# Altium PCB RockRTK.PcbDoc (part 1 of 8)
Units mm, origin at the board's own origin, x right, y up, seen from the top; angles counter-clockwise.
Board outline 128 x 72 mm, 6 copper layers (Top Layer, MidLayer1GND, MidLayer2SIG, MidLayer3PWR, MidLayer4GND, Bottom Layer), stack 1.538 mm thick; 400 components, 307 nets, 1795 pads, 1243 vias.
Unrouted connection lines stored in the file: 522.
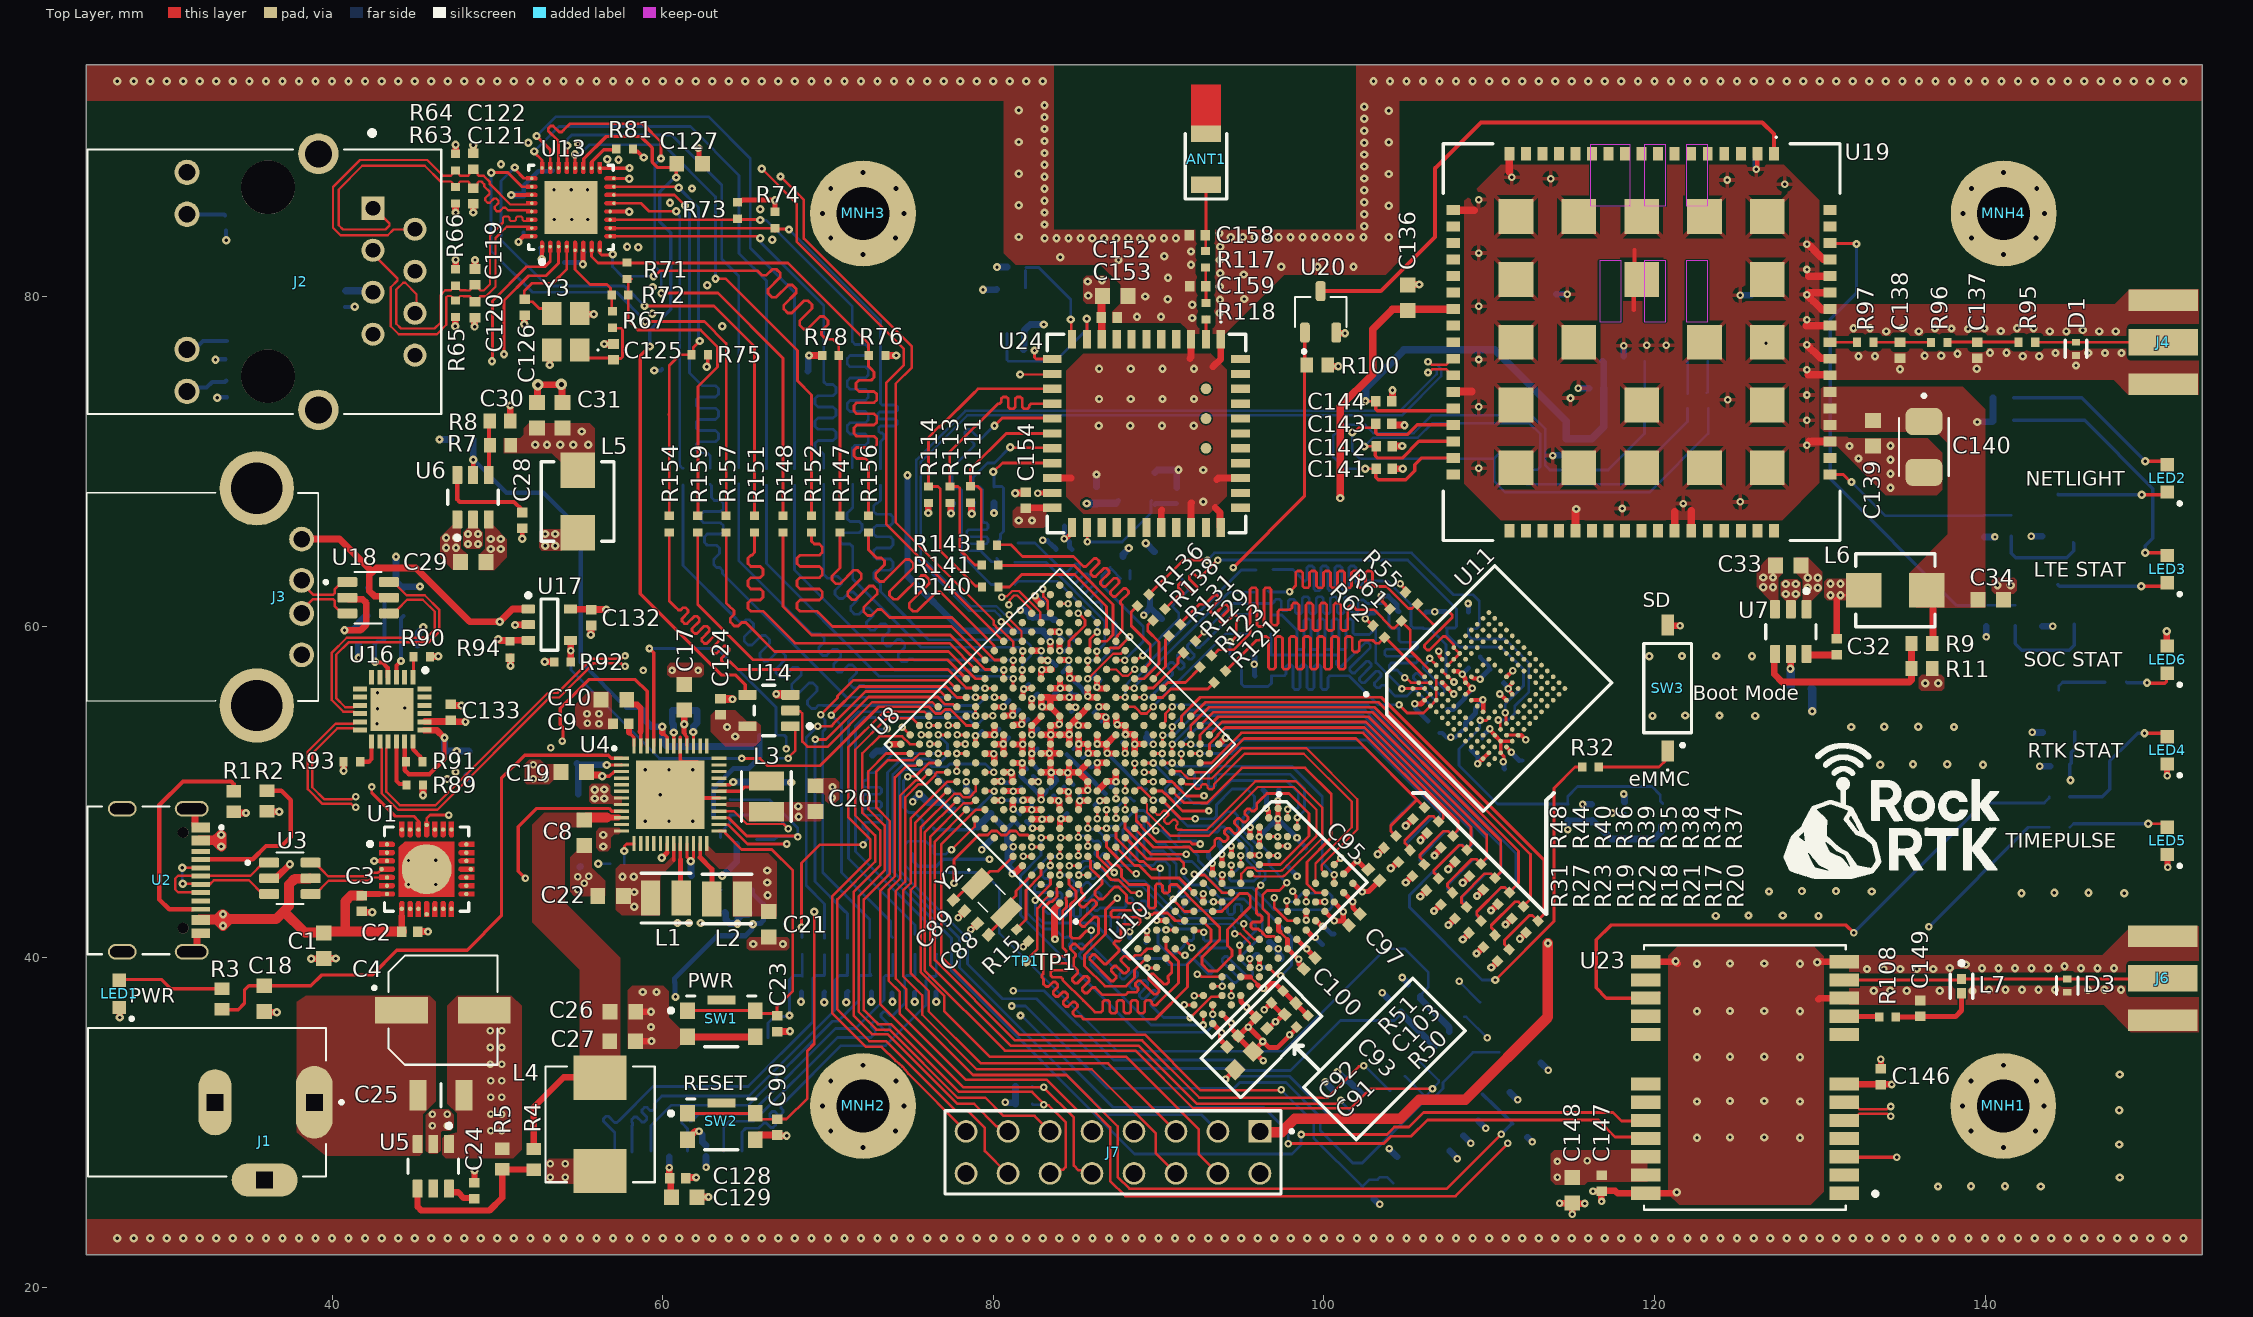
[diagram p0: Top Layer view]
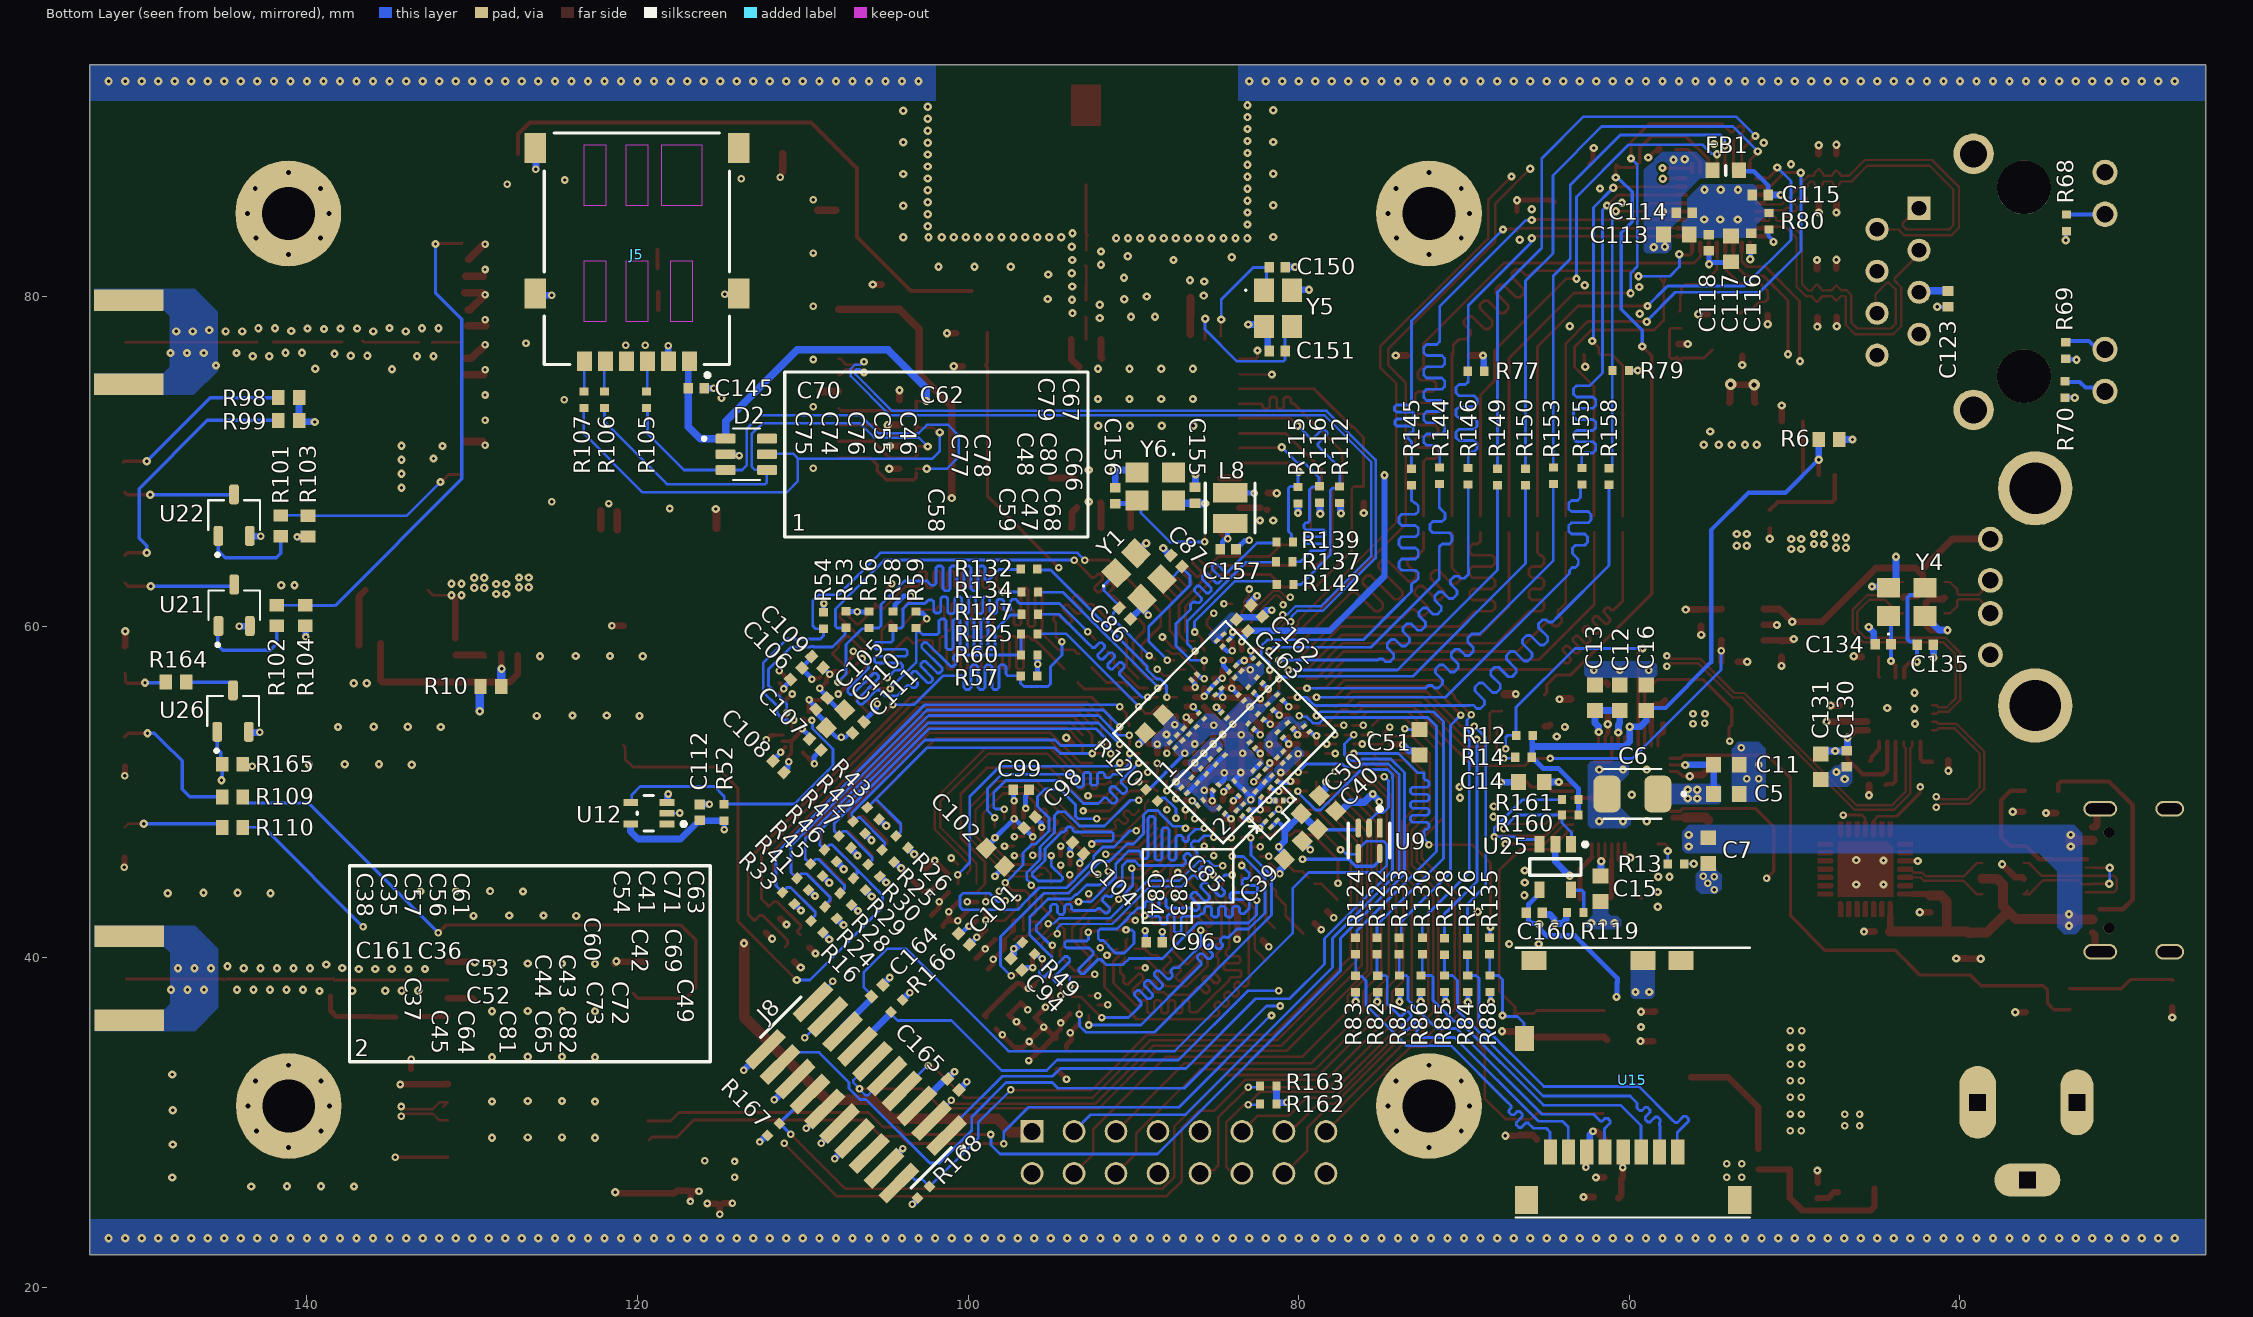
[diagram p1: Bottom Layer view, seen from below]
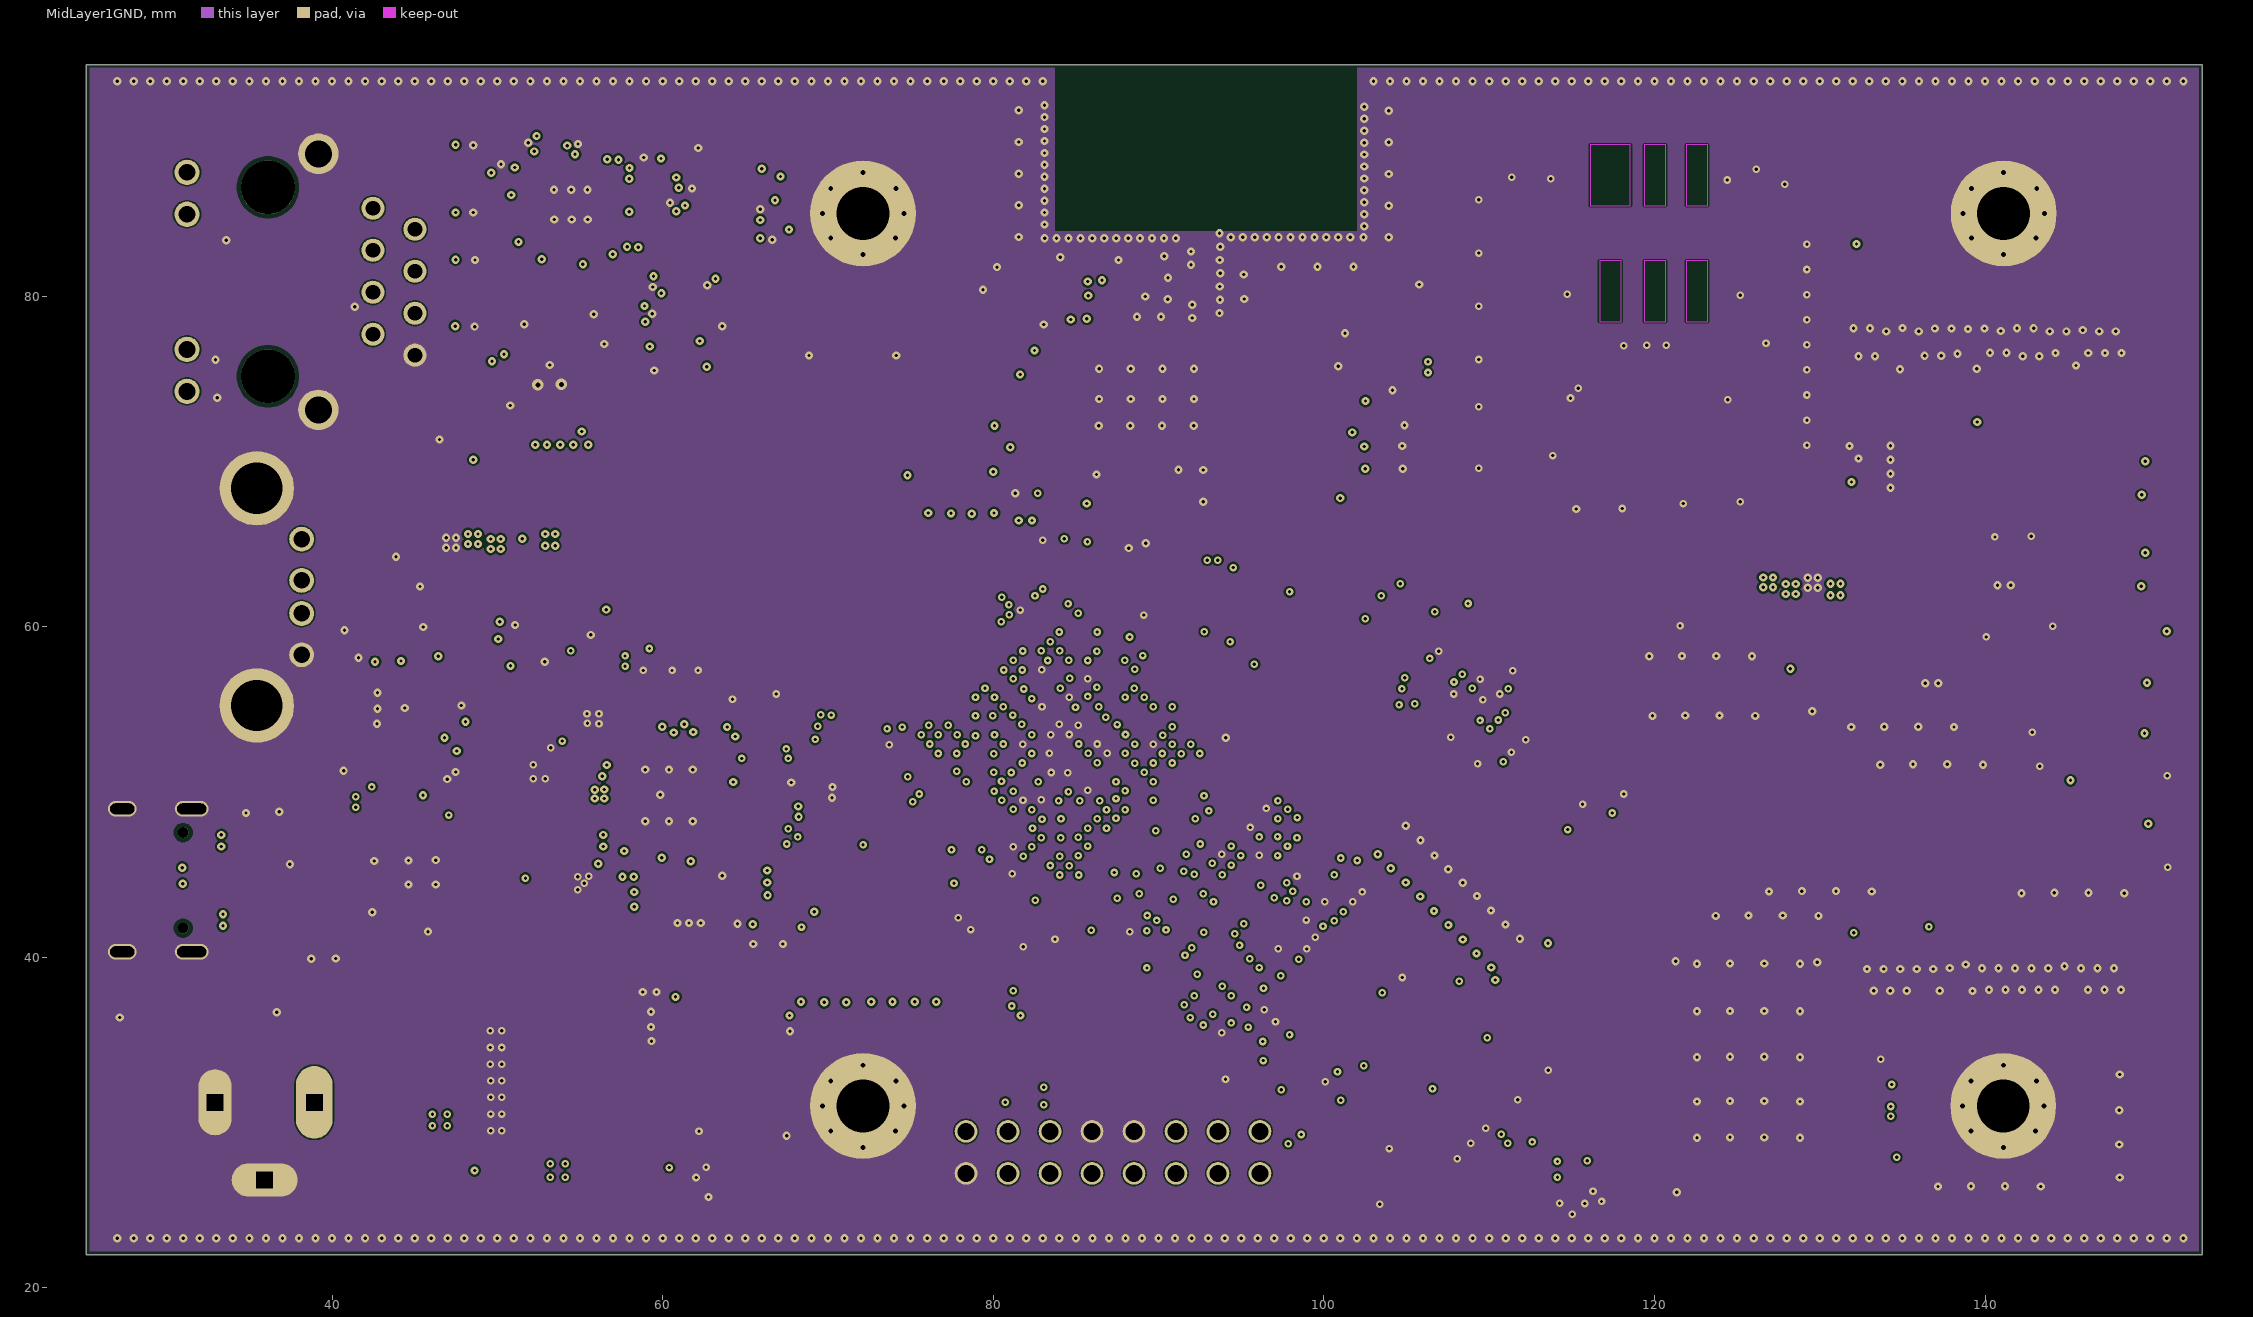
[diagram p2: MidLayer1GND]
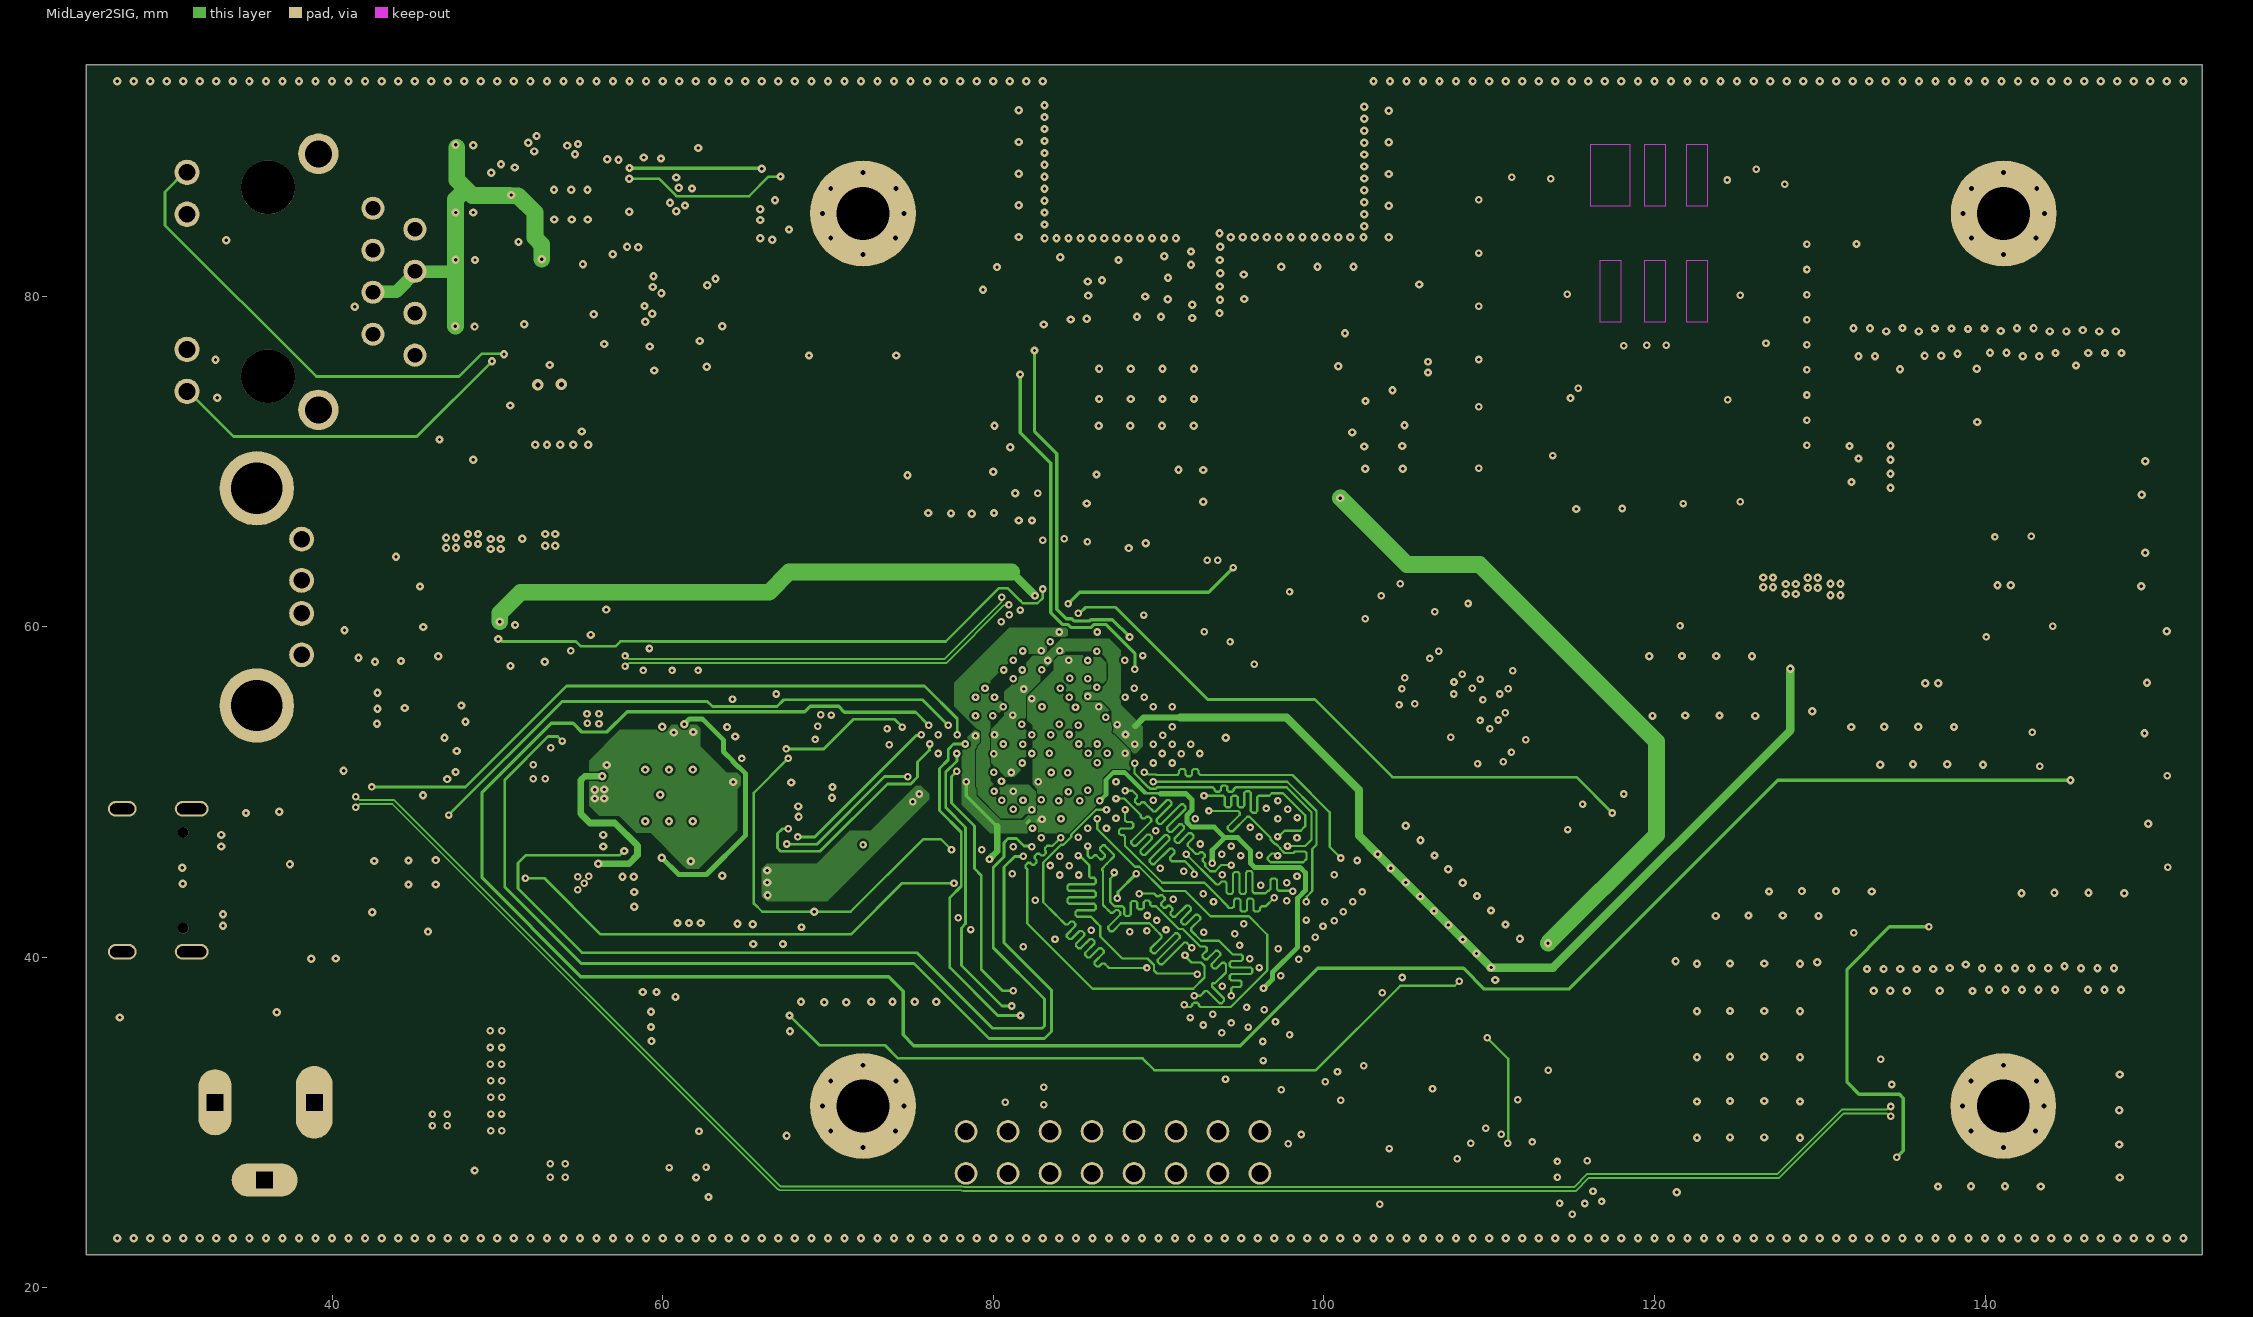
[diagram p3: MidLayer2SIG]
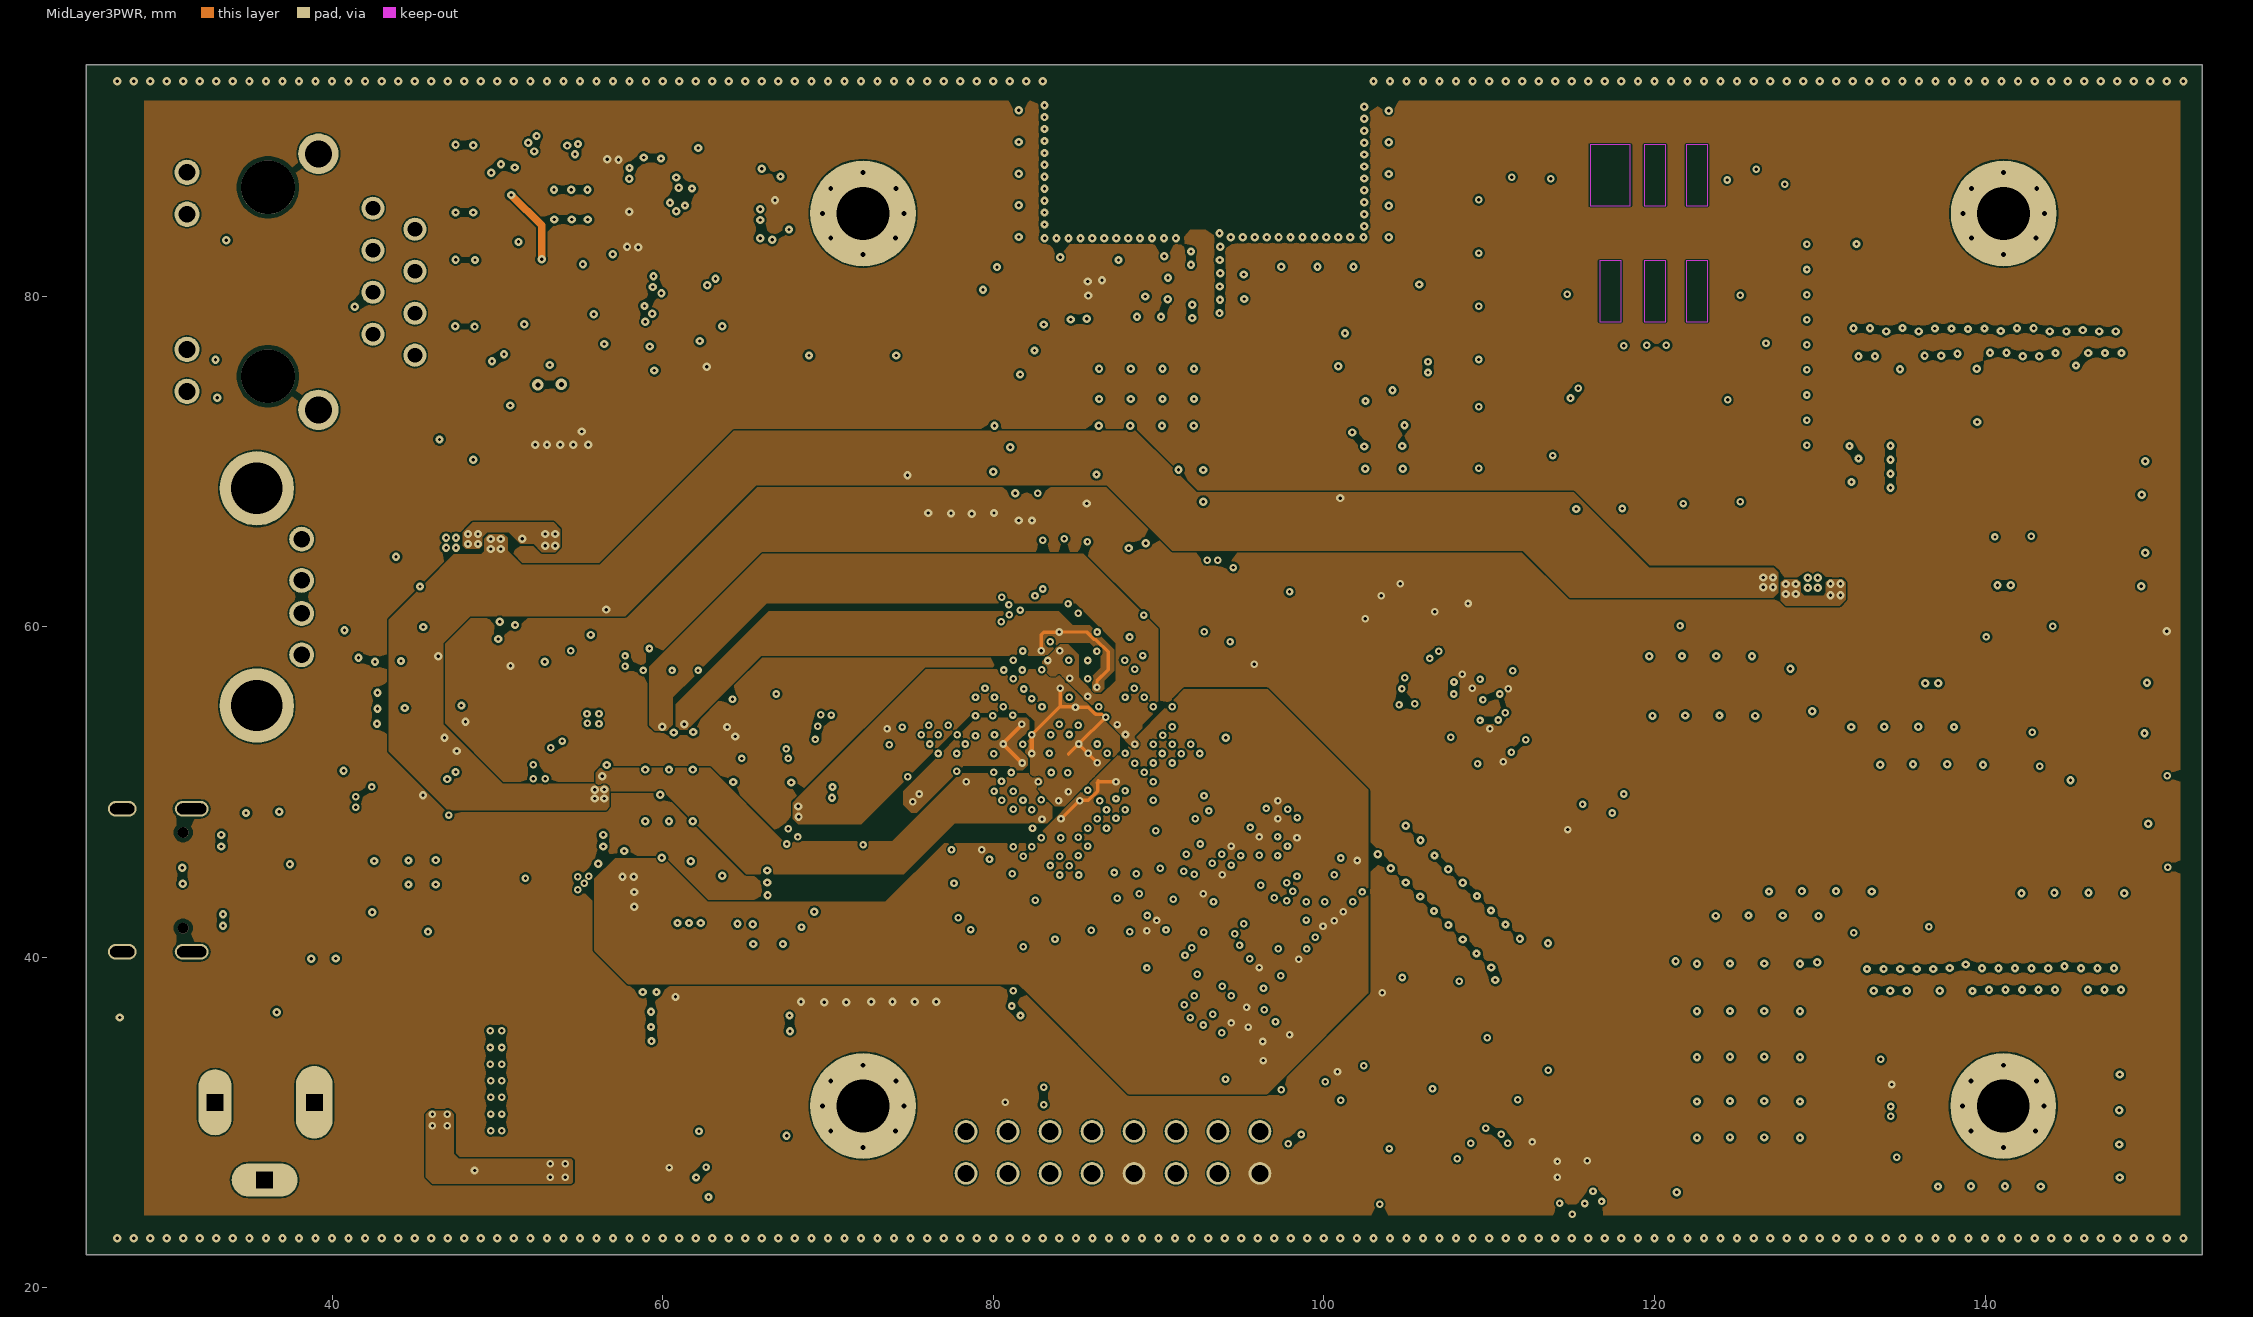
[diagram p4: MidLayer3PWR]
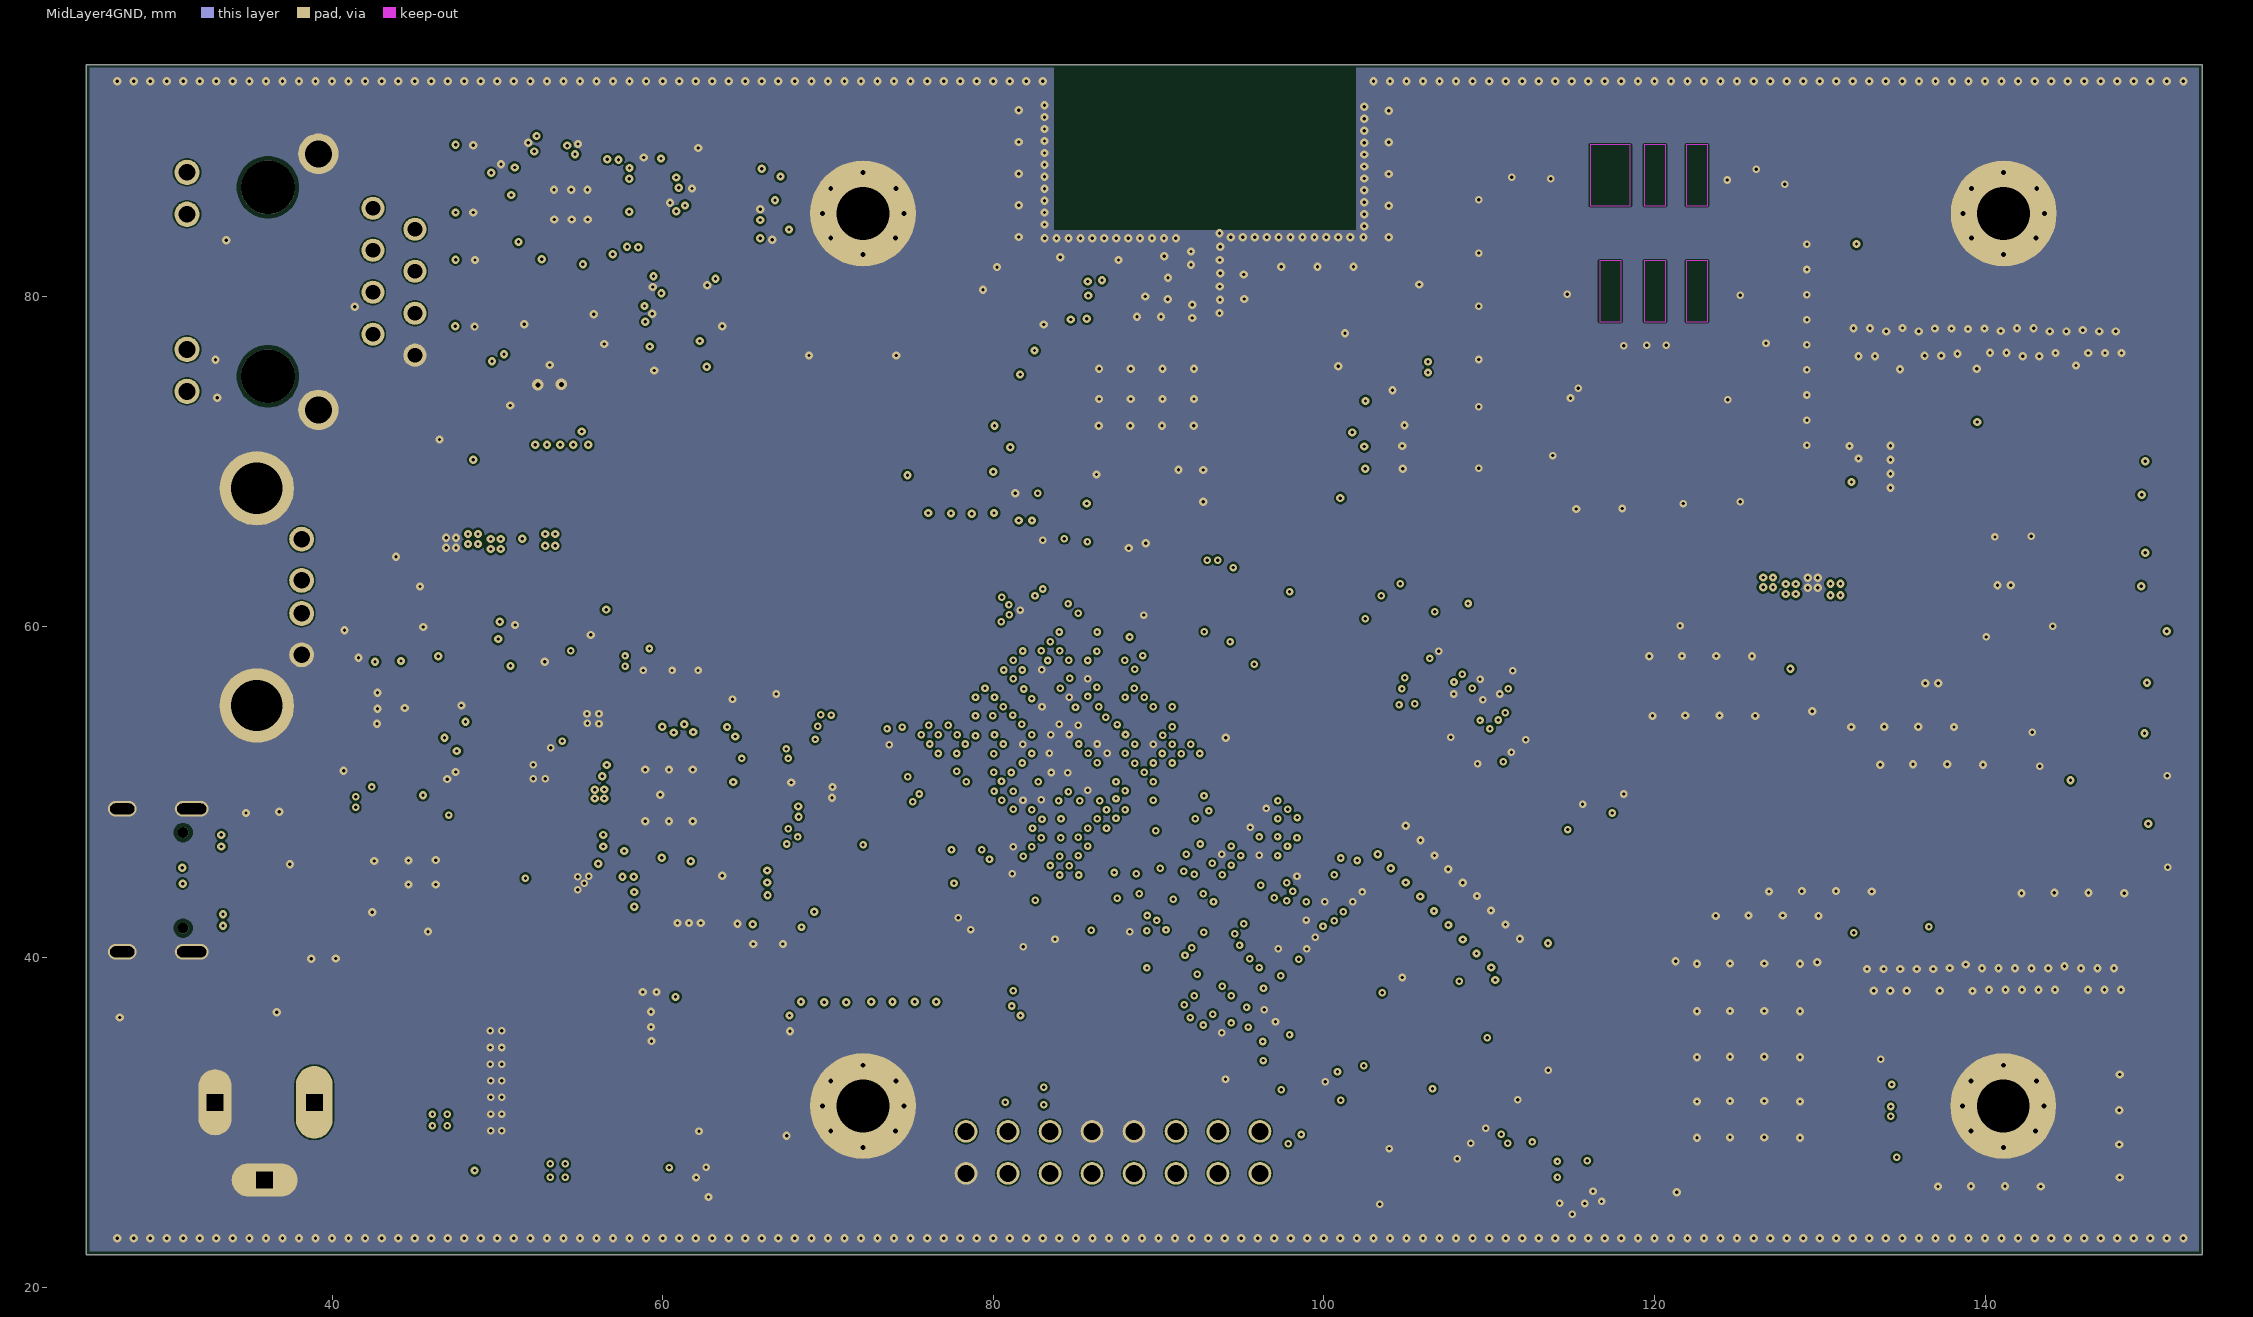
[diagram p5: MidLayer4GND]
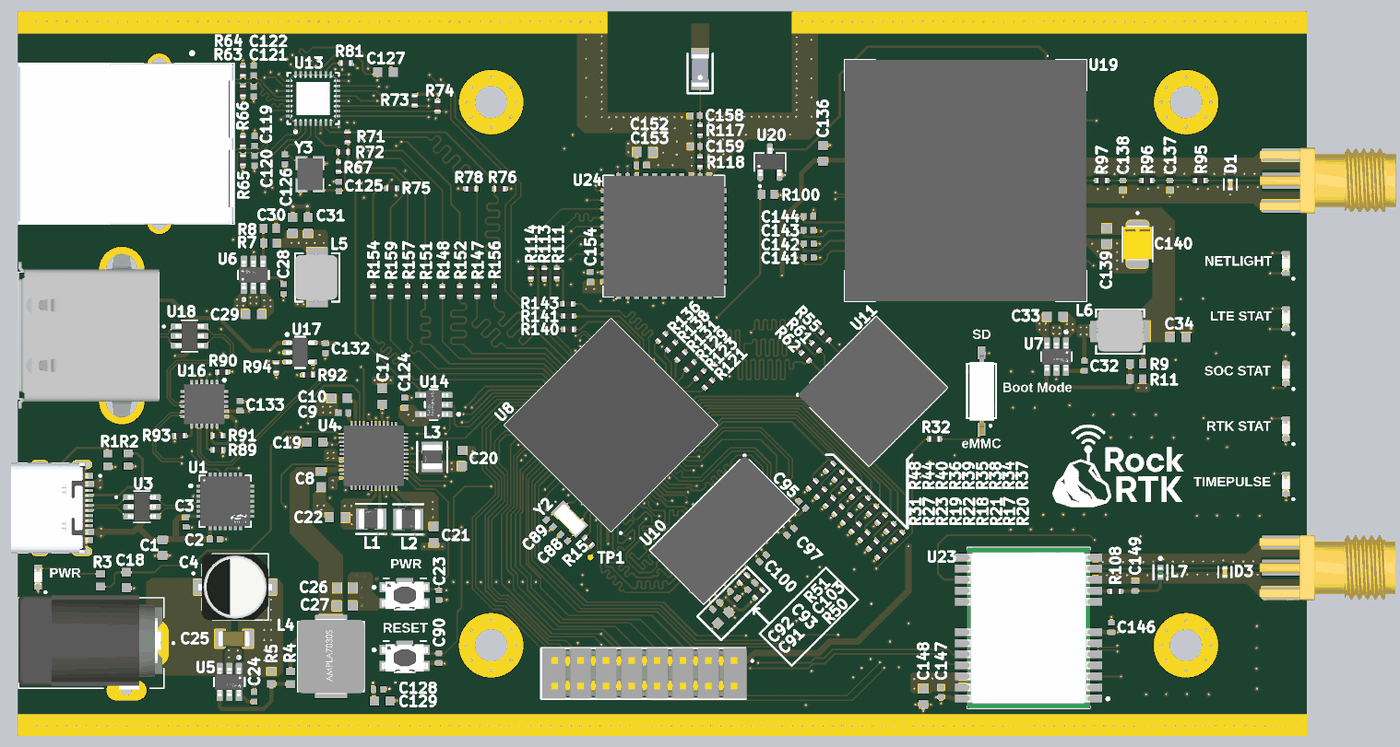
[diagram p12: 3D render of the assembled board from above, using the file's embedded part models]
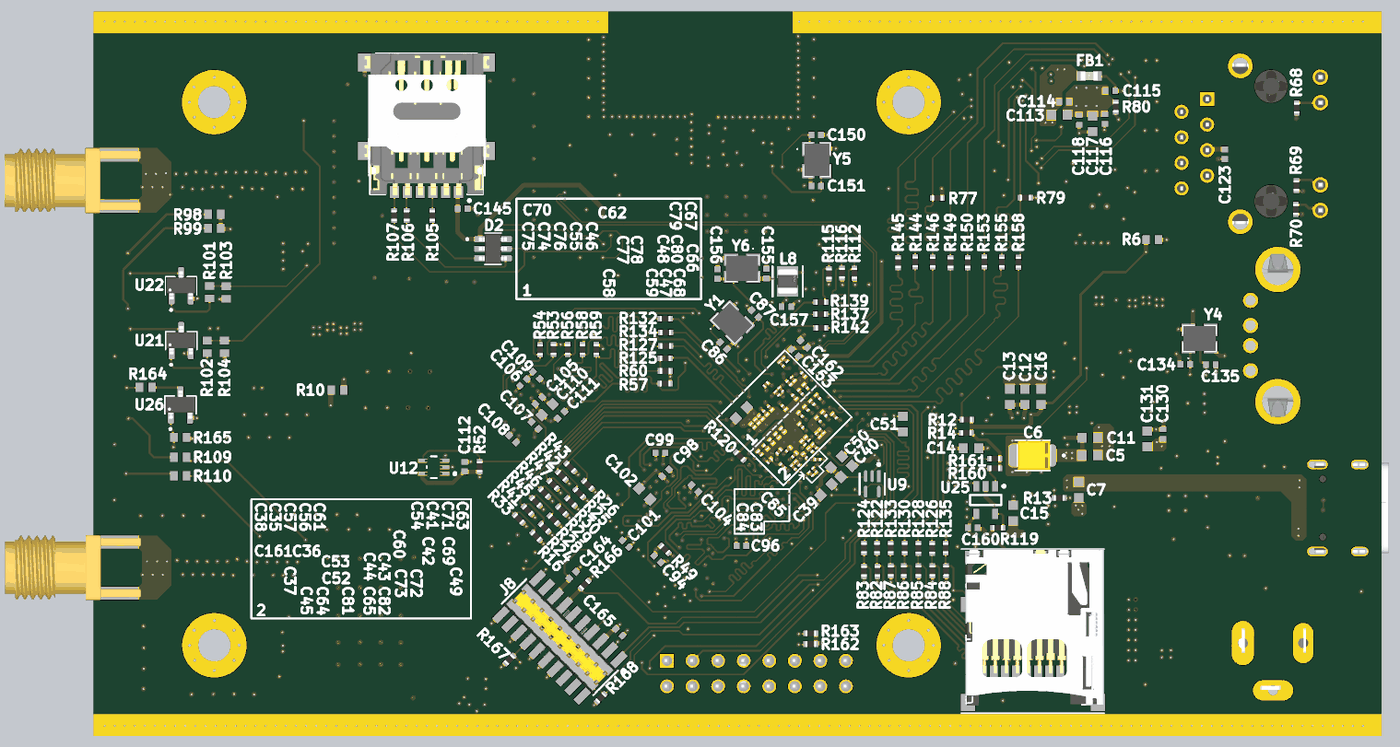
[diagram p13: 3D render of the assembled board from below, using the file's embedded part models]

## Layer stack, top to bottom
Top Solder: solder mask 0.0127, Solder Resist, Dk 3.8
Top Layer: signal copper 0.035
Dielectric 1: prepreg 0.0994, 3313, Dk 4.1
MidLayer1GND: signal copper 0.0152
Core 1: core 0.55, FR-4, Dk 4.6
MidLayer2SIG: signal copper 0.0152
Dielectric 2: prepreg 0.1088, 2116, Dk 4.16
MidLayer3PWR: signal copper 0.0152
Core 2: core 0.55, FR-4, Dk 4.6
MidLayer4GND: signal copper 0.0152
Dielectric 3: prepreg 0.0994, 3313, Dk 4.1
Bottom Layer: signal copper 0.035
Bottom Solder: solder mask 0.0127, Solder Resist, Dk 3.8

## Board outline
25.127,22 25.127,94 153.127,94 153.127,22

## Design rules (kind name [scope] priority, off if disabled: settings)
BoardOutlineClearance BoardOutlinegGuardRingClearance [IsPolygon AND (Name Like 'GUARD_RING_GND_TOP' OR Name Like 'GUARD_RING_MASK_TOP' OR Name Like 'GUARD_RING_GND_BOTTOM' OR Name Like 'GUARD_RING_MASK_BOTTOM')] p1: gap=0.2 ignorepadtopadclearanceinfootprint=FALSE except(0: Poly-OutlineEdge)
BoardOutlineClearance BoardOutlineSilkClearance [OnLayer('Top Overlay')] p2: gap=0.2 ignorepadtopadclearanceinfootprint=FALSE except(0: Track-OutlineEdge)
BoardOutlineClearance [All] p3: gap=0.2 ignorepadtopadclearanceinfootprint=FALSE
Clearance 3V3Layer4 [InNamedPolygon('3V3_4LAYER')] p1: gap=0.254 ignorepadtopadclearanceinfootprint=FALSE
Clearance "Stitching GND" [IsStitchingVia and InNet('GND') vs (IsVia and (Not IsStitchingVia)) Or IsPad] p2: gap=0.5 ignorepadtopadclearanceinfootprint=FALSE
Clearance "Stitching No Net" [IsStitchingVia and InNet('No Net') vs (IsVia and (Not IsStitchingVia)) Or IsPad] p3: gap=0.127 ignorepadtopadclearanceinfootprint=FALSE
Clearance [All] p4: gap=0.089 ignorepadtopadclearanceinfootprint=FALSE except(0.1: SMDPad-Via; 0.127: Arc-Via Track-Via THPad-Via Via-Via Via-Fill Via-Poly Via-Region Via-Text; 0.15: SMDPad-Hole; 0.25: Arc-Hole Track-Hole THPad-Hole Via-Hole Fill-Hole Poly-Hole Region-Hole Text-Hole)
ComponentClearance [All] p1: gap=0.089 collisioncheckmode=3 verticalgap=0.089 showdistances=TRUE
DiffPairsRouting DiffPair [InDifferentialPair ('DDR3L_DQS1')] p1: maxlimit=0.203 minlimit=0.203 mostfreqgap=0.203 toplayer_minwidth=0.138 toplayer_maxwidth=0.138 toplayer_prefwidth=0.138 midlayer2_minwidth=0.108 midlayer2_maxwidth=0.108 midlayer2_prefwidth=0.108 midlayer3_minwidth=0.108 midlayer3_maxwidth=0.108 midlayer3_prefwidth=0.108 bottomlayer_minwidth=0.138 bottomlayer_maxwidth=0.138 bottomlayer_prefwidth=0.138 impedanceprofiledriven=TRUE impedanceprofileid={A6AB74A0-47EF-4ED0-91CB-7269551F2D8C} impedanceprofilevalue=100.000000 maxuncoupledlength=12.7
DiffPairsRouting DIFF100 [InDifferentialPairClass('DIFF100')] p2: maxlimit=0.203 minlimit=0.203 mostfreqgap=0.203 toplayer_minwidth=0.138 toplayer_maxwidth=0.138 toplayer_prefwidth=0.138 midlayer2_minwidth=0.108 midlayer2_maxwidth=0.108 midlayer2_prefwidth=0.108 midlayer3_minwidth=0.108 midlayer3_maxwidth=0.108 midlayer3_prefwidth=0.108 bottomlayer_minwidth=0.138 bottomlayer_maxwidth=0.138 bottomlayer_prefwidth=0.138 impedanceprofiledriven=TRUE impedanceprofileid={A6AB74A0-47EF-4ED0-91CB-7269551F2D8C} impedanceprofilevalue=100.000000 maxuncoupledlength=12.7
DiffPairsRouting DIFF90 [InDifferentialPairClass('DIFF90')] p3: maxlimit=0.127 minlimit=0.127 mostfreqgap=0.127 toplayer_minwidth=0.146 toplayer_maxwidth=0.146 toplayer_prefwidth=0.146 midlayer2_minwidth=0.113 midlayer2_maxwidth=0.113 midlayer2_prefwidth=0.113 midlayer3_minwidth=0.113 midlayer3_maxwidth=0.113 midlayer3_prefwidth=0.113 bottomlayer_minwidth=0.146 bottomlayer_maxwidth=0.146 bottomlayer_prefwidth=0.146 impedanceprofiledriven=TRUE impedanceprofileid={8EBA4F38-930D-482D-A09E-9571FC228CDE} impedanceprofilevalue=90.000000 maxuncoupledlength=12.7
Height [All] p1: minheight=0 maxheight=1816.048 prefheight=12.7
HoleSize [All] p1: absolutevalues=TRUE maxlimit=6.3 minlimit=0.2 maxpercent=80.000 minpercent=20.000
HoleToHoleClearance [All] p1: gap=0.25 allowstackedmicrovias=FALSE
MatchedLengths RJ45LengthMatch [InDifferentialPair('RJ45_RX') OR InDifferentialPair('RJ45_TX')] p1: tolerance=0.025 checknetsindiffpair=TRUE checkdiffpairvsdiffpair=FALSE checkxsignals=FALSE checkothers=FALSE
MatchedLengths EMMCLengthMatch [InxSignalClass('EMMC_GROUP_XSIGNAL')] p2: tolerance=0.254 checknetsindiffpair=FALSE checkdiffpairvsdiffpair=TRUE checkxsignals=TRUE checkothers=TRUE
MatchedLengths SDCARDLengthMatch [InxSignalClass('SDCARD_GROUP_XSIG')] p3: tolerance=0.254 checknetsindiffpair=FALSE checkdiffpairvsdiffpair=TRUE checkxsignals=TRUE checkothers=TRUE
MatchedLengths SDWIFILengthMatch [InxSignalClass('SDWIFI_GROUP_XSIG')] p4: tolerance=0.254 checknetsindiffpair=FALSE checkdiffpairvsdiffpair=TRUE checkxsignals=TRUE checkothers=TRUE
MatchedLengths DIFF100LengthMatch [InDifferentialPairClass('DIFF100')] p5: tolerance=0.025 checknetsindiffpair=TRUE checkdiffpairvsdiffpair=FALSE checkxsignals=FALSE checkothers=FALSE
MatchedLengths DDR3DataByte1Group [InNetClass('DDR3_DATA_BYTE_GROUP_1')] p6: tolerance=0.254 checknetsindiffpair=FALSE checkdiffpairvsdiffpair=TRUE checkxsignals=TRUE checkothers=TRUE
MatchedLengths DDR3DataByte0Group [InNetClass('DDR3_DATA_BYTE_GROUP_0')] p7: tolerance=0.254 checknetsindiffpair=FALSE checkdiffpairvsdiffpair=TRUE checkxsignals=TRUE checkothers=TRUE
MatchedLengths DDR3ClkGroup [InNetClass('DDR3_CLOCK_GROUP')] p8: tolerance=0.254 checknetsindiffpair=FALSE checkdiffpairvsdiffpair=TRUE checkxsignals=TRUE checkothers=TRUE
MatchedLengths DDR3AddrCmdGroup [InNetClass('DDR3_ADDR_CMD_GROUP')] p9: tolerance=0.254 checknetsindiffpair=FALSE checkdiffpairvsdiffpair=TRUE checkxsignals=TRUE checkothers=TRUE
MatchedLengths MIILengthMatch [InxSignalClass('MII_GROUP_XSIG')] p10: tolerance=0.635 checknetsindiffpair=FALSE checkdiffpairvsdiffpair=TRUE checkxsignals=TRUE checkothers=TRUE
MinimumAnnularRing [All] p1: minimumring=0.076
MinimumSolderMaskSliver [All] p1: minsoldermaskwidth=0
PlaneClearance 3V3_PWR_PLANE [InNamedPolygon('3V3_PWR_PLANE')] p1: clearance=0.508
PlaneClearance [All] p2: clearance=0.089
PlaneConnect PlaneConnectPowerPads [InPadClass('PowerPads')] p1: planeconnectstyle=Direct reliefexpansion=0.508 reliefentries=4 reliefconductorwidth=0.254 reliefairgap=0.254
PlaneConnect [All] p2: planeconnectstyle=Direct reliefexpansion=0.3 reliefentries=4 reliefconductorwidth=0.089 reliefairgap=0.089
PolygonConnect PolygonConnectUnderModules [All vs IsNamedPolygon('UNDER_MODULE_LTE')] p1: thpad.connectstyle=Relief thpad.reliefconductorwidth=0.254 thpad.reliefentries=4 thpad.polygonreliefangle="90 Angle" thpad.airgapwidth=0.254 smdpad.connectstyle=Relief smdpad.reliefconductorwidth=0.254 smdpad.reliefentries=4 smdpad.polygonreliefangle="45 Angle" smdpad.airgapwidth=0.254 via.connectstyle=Relief via.reliefconductorwidth=0.254 via.reliefentries=4 via.polygonreliefangle="90 Angle" via.airgapwidth=0.254
PolygonConnect PolygonConnectPowerPads [All vs (InPadClass('PowerPads'))] p2: connectstyle=Direct reliefconductorwidth=0.254 reliefentries=4 polygonreliefangle="90 Angle" airgapwidth=0.254
PolygonConnect [All] p3: connectstyle=Direct reliefconductorwidth=0.089 reliefentries=4 polygonreliefangle="90 Angle" airgapwidth=0.089
RoutingVias [All] p1: holewidth=0.2 width=0.45 viastyle="Through Hole" minholewidth=0.2 minwidth=0.45 maxholewidth=6.3 maxwidth=6.55
SilkToSilkClearance [All] p1: silktosilkclearance=0
SilkToSolderMaskClearance [IsPad] p1: minsilkscreentomaskgap=0.089 clearancetoexposedcopper=TRUE
SolderMaskExpansion [All] p1: expansion=0.075 istentingtop=FALSE
SupplyNets "Schematic Supply Nets_18" [InNet('VBUS_IN')] p1: voltage=0.000
SupplyNets "Schematic Supply Nets_17" [InNet('VBUS_OUT')] p2: voltage=0.000
SupplyNets "Schematic Supply Nets_16" [InNet('GND')] p3: voltage=0.000
SupplyNets "Schematic Supply Nets_15" [InNet('3V3')] p4: voltage=0.000
SupplyNets "Schematic Supply Nets_14" [InNet('3V7')] p5: voltage=0.000
SupplyNets "Schematic Supply Nets_13" [InNet('LDO_3V3')] p6: voltage=0.000
SupplyNets "Schematic Supply Nets_12" [InNet('VDD_1V5_DDR3L')] p7: voltage=0.000
SupplyNets "Schematic Supply Nets_11" [InNet('LDO_1V8')] p8: voltage=0.000
SupplyNets "Schematic Supply Nets_10" [InNet('VDD_1V1_MPU')] p9: voltage=0.000
SupplyNets "Schematic Supply Nets_9" [InNet('VDD_1V1_CORE')] p10: voltage=0.000
SupplyNets "Schematic Supply Nets_8" [InNet('PHY_VDDCR')] p11: voltage=0.000
SupplyNets "Schematic Supply Nets_7" [InNet('PHY_VDDA')] p12: voltage=0.000
SupplyNets "Schematic Supply Nets_6" [InNet('SIM_VDD')] p13: voltage=0.000
SupplyNets "Schematic Supply Nets_5" [InNet('VCCIN')] p14: voltage=0.000
SupplyNets "Schematic Supply Nets_4" [InNet('DDR_VREF')] p15: voltage=0.000
SupplyNets "Schematic Supply Nets_3" [InNet('LDO_1V8_RTC')] p16: voltage=0.000
SupplyNets "Schematic Supply Nets_2" [InNet('5V_SYS')] p17: voltage=0.000
SupplyNets "Schematic Supply Nets_1" [InNet('5VIN')] p18: voltage=0.000
SupplyNets "Schematic Supply Nets" [InNet('LDO_POWER_LED')] p19: voltage=0.000
Width RFTraceImpedance [InNetClass('RF_TRACE')] p1: maxlimit=0.167 minlimit=0.118 preferedwidth=0.147 toplayer_minwidth=0.167 toplayer_prefwidth=0.167 midlayer2_maxwidth=0.118 midlayer2_prefwidth=0.118 midlayer3_maxwidth=0.118 midlayer3_prefwidth=0.118 bottomlayer_minwidth=0.147 bottomlayer_maxwidth=0.147 impedanceprofiledriven=TRUE impedanceprofileid={81F7A5AC-D884-4479-AB0D-ED1311176530} impedanceprofilevalue=50.000000 minimp=50.000000 maximp=50.000000 favimp=50.000000
Width MMCImpedance [InNetClass('EMMC_GROUP') OR InNetClass('SDWIFI_GROUP') OR InNetClass('SDCARD_GROUP')] p2: maxlimit=0.169 minlimit=0.139 preferedwidth=0.169 toplayer_minwidth=0.169 midlayer2_maxwidth=0.139 midlayer2_prefwidth=0.139 midlayer3_maxwidth=0.139 midlayer3_prefwidth=0.139 bottomlayer_minwidth=0.169 impedanceprofiledriven=TRUE impedanceprofileid={5A89C1FB-E82D-4FD1-9412-6AF9453DA043} impedanceprofilevalue=50.000000 minimp=50.000000 maximp=50.000000 favimp=50.000000
Width DDR3SingleImpedance [InNetClass('DDR3_ADDR_CMD_GROUP') OR  InNetClass('DDR3_DATA_GROUP') OR  InNetClass('DDR3_CONTROL_GROUP')] p3: maxlimit=0.169 minlimit=0.139 preferedwidth=0.169 toplayer_minwidth=0.169 midlayer2_maxwidth=0.139 midlayer2_prefwidth=0.139 midlayer3_maxwidth=0.139 midlayer3_prefwidth=0.139 bottomlayer_minwidth=0.169 impedanceprofiledriven=TRUE impedanceprofileid={5A89C1FB-E82D-4FD1-9412-6AF9453DA043} impedanceprofilevalue=50.000000 minimp=50.000000 maximp=50.000000 favimp=50.000000
Width MIIImpedance [InNetClass('MII_GROUP')] p4: maxlimit=0.169 minlimit=0.139 preferedwidth=0.169 toplayer_minwidth=0.169 midlayer2_maxwidth=0.139 midlayer2_prefwidth=0.139 midlayer3_maxwidth=0.139 midlayer3_prefwidth=0.139 bottomlayer_minwidth=0.169 impedanceprofiledriven=TRUE impedanceprofileid={5A89C1FB-E82D-4FD1-9412-6AF9453DA043} impedanceprofilevalue=50.000000 minimp=50.000000 maximp=50.000000 favimp=50.000000
20 further rules are at their usual default settings.

## Classes and differential pairs
net class RF_TRACE: F9P_RF_IN LTE_ANT LTE_ANT_CON LTE_ANT_MATCH LTE_ANT_MATCH_OUT WIFI_ANT WIFI_ANT_MATCH WIFI_ANT_MATCH_OUT
net class SDWIFI_GROUP: MMC2_CLK MMC2_CLK_R MMC2_CMD MMC2_CMD_R MMC2_DAT0 MMC2_DAT0_R MMC2_DAT1 MMC2_DAT1_R MMC2_DAT2 MMC2_DAT2_R MMC2_DAT3 MMC2_DAT3_R
net class SDCARD_GROUP: MMC0_CLK MMC0_CLK_R MMC0_CMD MMC0_CMD_R MMC0_DAT0 MMC0_DAT0_R MMC0_DAT1 MMC0_DAT1_R MMC0_DAT2 MMC0_DAT2_R MMC0_DAT3 MMC0_DAT3_R
net class EMMC_GROUP: MMC1_CLK MMC1_CLK_R MMC1_CMD MMC1_CMD_R MMC1_DAT0 MMC1_DAT0_R MMC1_DAT1 MMC1_DAT1_R MMC1_DAT2 MMC1_DAT2_R MMC1_DAT3 MMC1_DAT3_R MMC1_DAT4 MMC1_DAT4_R MMC1_DAT5 MMC1_DAT5_R MMC1_DAT6 MMC1_DAT6_R MMC1_DAT7 MMC1_DAT7_R
net class MDI_GROUP: RJ45_RX_N RJ45_RX_P RJ45_TX_N RJ45_TX_P
net class MII_GROUP: PHY_COL PHY_CRS PHY_REFCLK PHY_RXCLK PHY_RXD0 PHY_RXD1 PHY_RXD2 PHY_RXD3 PHY_RXDV PHY_RXER PHY_TXCLK PHY_TXD0 PHY_TXD1 PHY_TXD2 PHY_TXD3 PHY_TXEN SOC_MII_COL SOC_MII_CRS SOC_MII_RXCLK SOC_MII_RXD0 SOC_MII_RXD1 SOC_MII_RXD2 SOC_MII_RXD3 SOC_MII_RXDV SOC_MII_RXER SOC_MII_TXCLK SOC_MII_TXD0 SOC_MII_TXD1 SOC_MII_TXD2 SOC_MII_TXD3 SOC_MII_TXEN SOC_RMII_REFCLK
component class Designator: C1 C2 C3 C4 J1 MNH1 MNH2 MNH3 MNH4 R1 R2 U1 U2 U3
net class DDR3_CONTROL_GROUP: DDR3L_CSE DDR3L_CSN DDR3L_ODT
net class DDR3_CLOCK_GROUP: DDR3L_CLK_N DDR3L_CLK_P
net class DDR3_ADDR_CMD_GROUP: DDR3L_A0 DDR3L_A1 DDR3L_A2 DDR3L_A3 DDR3L_A4 DDR3L_A5 DDR3L_A6 DDR3L_A7 DDR3L_A8 DDR3L_A9 DDR3L_A10 DDR3L_A11 DDR3L_A12 DDR3L_A13 DDR3L_A14 DDR3L_B0 DDR3L_B1 DDR3L_B2 DDR3L_CASN DDR3L_RASN DDR3L_WEN NetU8_D3
net class DDR3_DATA_BYTE_GROUP_0: DDR3L_D0 DDR3L_D1 DDR3L_D2 DDR3L_D3 DDR3L_D4 DDR3L_D5 DDR3L_D6 DDR3L_D7 DDR3L_DQM0 DDR3L_DQS0_N DDR3L_DQS0_P
net class DDR3_DATA_GROUP: DDR3L_D0 DDR3L_D1 DDR3L_D2 DDR3L_D3 DDR3L_D4 DDR3L_D5 DDR3L_D6 DDR3L_D7 DDR3L_D8 DDR3L_D9 DDR3L_D10 DDR3L_D11 DDR3L_D12 DDR3L_D13 DDR3L_D14 DDR3L_D15 DDR3L_DQM0 DDR3L_DQM1 DDR3L_DQS0_N DDR3L_DQS0_P DDR3L_DQS1_N DDR3L_DQS1_P
net class DDR3_DATA_BYTE_GROUP_1: DDR3L_D8 DDR3L_D9 DDR3L_D10 DDR3L_D11 DDR3L_D12 DDR3L_D13 DDR3L_D14 DDR3L_D15 DDR3L_DQM1 DDR3L_DQS1_N DDR3L_DQS1_P
differential pair class DIFF100: DDR3L_CLK DDR3L_DQS0 DDR3L_DQS1 RJ45_RX RJ45_TX
differential pair class DIFF90: F9P_USB GP_USB HUB_USB2 TYPEC_USB USB0 USB1 USB_CONVR
net class PHY_TXD[0..3]: PHY_TXD0 PHY_TXD1 PHY_TXD2 PHY_TXD3
net class PHY_RXD[0..3]: PHY_RXD0 PHY_RXD1 PHY_RXD2 PHY_RXD3
net class MMC2_DAT[0..3]: MMC2_DAT0 MMC2_DAT1 MMC2_DAT2 MMC2_DAT3
net class MMC1_DAT[0..7]: MMC1_DAT0 MMC1_DAT1 MMC1_DAT2 MMC1_DAT3 MMC1_DAT4 MMC1_DAT5 MMC1_DAT6 MMC1_DAT7
net class MMC0_DAT[0..3]: MMC0_DAT0 MMC0_DAT1 MMC0_DAT2 MMC0_DAT3
net class DDR3L_D[0..15]: DDR3L_D0 DDR3L_D1 DDR3L_D2 DDR3L_D3 DDR3L_D4 DDR3L_D5 DDR3L_D6 DDR3L_D7 DDR3L_D8 DDR3L_D9 DDR3L_D10 DDR3L_D11 DDR3L_D12 DDR3L_D13 DDR3L_D14 DDR3L_D15
net class DDR3L_B[0..2]: DDR3L_B0 DDR3L_B1 DDR3L_B2
net class DDR3L_A[0..14]: DDR3L_A0 DDR3L_A1 DDR3L_A2 DDR3L_A3 DDR3L_A4 DDR3L_A5 DDR3L_A6 DDR3L_A7 DDR3L_A8 DDR3L_A9 DDR3L_A10 DDR3L_A11 DDR3L_A12 DDR3L_A13 DDR3L_A14
component class "SoC MMC": R121 R122 R123 R124 R125 R126 R127 R128 R129 R130 R131 R132 R133 R134 R135 R136 R137 R138 R139 R140 R141 R142 R143
component class "Micro SD Card": C128 C129 R82 R83 R84 R85 R86 R87 R88 U15
component class Designator: C113 C114 C115 C116 C117 C118 C119 C120 C121 C122 C123 C124 C125 C126 C127 FB1 J2 R63 R64 R65 R66 R67 R68 R69 R70 R71 R72 R73 R74 R75 R76 R77 R78 R79 R80 R81 U13 U14 Y3
component class "DDR3L Chip": C91 C92 C93 C94 C95 C96 C97 C98 C99 C100 C101 C102 C103 C104 R49 R50 R51 U10
component class "AM3358 DDR Controller": C161 R120
differential pair USB_CONVR: +USB_CONVR_P -USB_CONVR_N
differential pair USB1: +USB1_P -USB1_N
differential pair USB0: +USB0_P -USB0_N
differential pair TYPEC_USB: +TYPEC_USB_P -TYPEC_USB_N
differential pair RJ45_TX: +RJ45_TX_P -RJ45_TX_N
differential pair RJ45_RX: +RJ45_RX_P -RJ45_RX_N
differential pair HUB_USB2: +HUB_USB2_P -HUB_USB2_N
differential pair GP_USB: +GP_USB_P -GP_USB_N
differential pair F9P_USB: +F9P_USB_P -F9P_USB_N
differential pair DDR3L_DQS1: +DDR3L_DQS1_P -DDR3L_DQS1_N
differential pair DDR3L_DQS0: +DDR3L_DQS0_P -DDR3L_DQS0_N
differential pair DDR3L_CLK: +DDR3L_CLK_P -DDR3L_CLK_N

## Components (designator, comment, footprint, x,y, rotation, side; value= is the part's Value field where it differs from the comment)
ANT1 "ANT3216LL00R2400A" ANT_1206 92.925,88.275 r90 top
C1 "10uF 16V" C_0603 39.5,40.7 r270 top
C2 "100nF 16V" C_0402 44.7,41.55 r0 top
C3 "100nF 16V" C_0402 41.8,43.25 r270 top
C4 "50V 100uF" CAP_D6.3xL7.7mm 46.875,36.8 r0 top
C5 "10uF 16V" C_0603 54.125,49.875 r180 bottom
C6 "100uF 10V" C_CASE-B 59.684,49.806 r270 bottom
C7 "10uF 16V" C_0603 55.225,46.45 r270 bottom
C8 "10uF 16V" C_0603 55.25,47.525 r270 top
C9 "100nF 16V" C_0402 57.475,54.125 r180 top
C10 "10uF 16V" C_0603 57.05,55.575 r180 top
C11 "10uF 16V" C_0603 54.125,51.65 r180 bottom
C12 "10uF 16V" C_0603 60.575,55.7 r90 bottom
C13 "10uF 16V" C_0603 62.075,55.7 r90 bottom
C14 "10uF 16V" C_0603 65.925,50.6 r0 bottom
C15 "10uF 16V" C_0603 61.75,44.15 r270 bottom
C16 "10uF 16V" C_0603 58.975,55.7 r90 bottom
C17 "10uF 16V" C_0603 61.3,55.725 r90 top
C18 "10uF 16V" C_0603 35.9,37.5 r270 top
C19 "10uF 16V" C_0603 54.625,51.2 r180 top
C20 "10uF 16V" C_0603 69.25,49.6 r90 top
C21 "10uF 16V" C_0603 66.425,42 r270 top
C22 "10uF 16V" C_0603 56.85,43.7 r180 top
C23 "100nF 16V" C_0402 66.925,35.975 r270 top
C24 "100nF 16V" C_0402 48.6,25.88 r90 top
C25 "10uF 50V" C_1206 46.575,31.6 r0 top
C26 "22uF 16V" C_0603 57.6,36.7 r0 top
C27 "22uF 16V" C_0603 57.575,34.925 r0 top
C28 "100nF 16V" C_0402 51.501,66.422 r270 top
C29 "10uF 16V" C_0603 48.541,63.908 r180 top
C30 "22uF 16V" C_0603 52.397,72.782 r90 top
C31 "22uF 16V" C_0603 53.946,72.782 r90 top
C32 "100nF 16V" C_0402 131.025,58.775 r90 top
C33 "10uF 16V" C_0603 128.1,63.7 r0 top
C34 "22uF 16V" C_0603 140.35,61.625 r0 top
C35 "100nF 10V" C_0201#1 86.329,50.69 r225 bottom
C36 "100nF 10V" C_0201#1 85,50.25 r135 bottom
C37 "100nF 10V" C_0201#1 84.625,48.875 r45 bottom
C38 "100nF 10V" C_0201#1 86.941,50.077 r225 bottom
C39 "10uF 16V" C_0603 80.325,46.475 r315 bottom
C40 "10uF 16V" C_0603 78.3,48.3 r315 bottom
C41 "100nF 10V" C_0201#1 82.291,54.566 r45 bottom
C42 "100nF 10V" C_0201#1 81.1,53.475 r45 bottom
C43 "100nF 10V" C_0201#1 82.175,51.55 r45 bottom
C44 "100nF 10V" C_0201#1 82.575,51.15 r45 bottom
C45 "100nF 10V" C_0201#1 83.575,48.725 r45 bottom
C46 "100nF 10V" C_0201#1 85.9,54.575 r225 bottom
C47 "100nF 10V" C_0201#1 82.875,56.2 r45 bottom
C48 "100nF 10V" C_0201#1 84.054,57.065 r225 bottom
C49 "100nF 10V" C_0201#1 79.5,53.825 r45 bottom
C50 "10uF 16V" C_0603 79.3,49.225 r315 bottom
C51 "10uF 16V" C_0603 72.7,53 r270 bottom
C52 "100nF 10V" C_0201#1 83.45,49.925 r135 bottom
C53 "100nF 10V" C_0201#1 84.05,50.475 r135 bottom
C54 "100nF 10V" C_0201#1 82.873,53.984 r45 bottom
C55 "100nF 10V" C_0201#1 86.379,54.095 r225 bottom
C56 "100nF 10V" C_0201#1 85.204,51.815 r225 bottom
C57 "100nF 10V" C_0201#1 85.779,51.24 r225 bottom
C58 "100nF 10V" C_0201#1 84.525,54.625 r225 bottom
C59 "100nF 10V" C_0201#1 83.5,55.675 r225 bottom
C60 "100nF 10V" C_0201#1 82.8,52.85 r45 bottom
C61 "100nF 10V" C_0201#1 84.654,52.365 r225 bottom
C62 "100nF 10V" C_0201#1 86.3,56.925 r135 bottom
C63 "100nF 10V" C_0201#1 81.126,55.731 r45 bottom
C64 "100nF 10V" C_0201#1 83.175,49.1 r45 bottom
C65 "100nF 10V" C_0201#1 81.875,50.45 r45 bottom
C66 "100nF 10V" C_0201#1 82.6,57.9 r225 bottom
C67 "100nF 10V" C_0201#1 84.371,59.39 r45 bottom
C68 "100nF 10V" C_0201#1 82.35,56.775 r45 bottom
C69 "100nF 10V" C_0201#1 80.5,54.025 r45 bottom
C70 "10uF 16V" C_0603 88.75,54.125 r315 bottom
C71 "100nF 10V" C_0201#1 81.708,55.148 r45 bottom
C72 "100nF 10V" C_0201#1 80.75,52.3 r45 bottom
C73 "100nF 10V" C_0201#1 81.125,51.925 r45 bottom
C74 "100nF 10V" C_0201#1 87.216,53.257 r225 bottom
C75 "100nF 10V" C_0201#1 87.654,52.82 r225 bottom
C76 "100nF 10V" C_0201#1 86.816,53.657 r225 bottom
C77 "100nF 10V" C_0201#1 85.225,56.025 r225 bottom
C78 "100nF 10V" C_0201#1 84.85,56.425 r225 bottom
C79 "100nF 10V" C_0201#1 84.771,58.99 r45 bottom
C80 "100nF 10V" C_0201#1 83.654,57.465 r225 bottom
C81 "100nF 10V" C_0201#1 82.425,49.875 r45 bottom
C82 "100nF 10V" C_0201#1 81.45,50.825 r45 bottom
C83 "100nF 10V" C_0201#1 81.5,48.425 r225 bottom
C84 "100nF 10V" C_0201#1 81.859,48.026 r225 bottom
C85 "100nF 10V" C_0201#1 81.175,49.5 r0 bottom
C86 "18pF 16V" C_0402 90.525,60.8 r45 bottom
C87 "18pF 16V" C_0402 87.4,63.975 r225 bottom
C88 "18pF 16V" C_0402 79.375,41.7 r315 top
C89 "18pF 16V" C_0402 77.925,43.125 r135 top
C90 "100nF 16V" C_0402 66.925,29.725 r270 top
C91 "10uF 16V" C_0603 95.175,33.75 r225 top
C92 "100nF 16V" C_0402 94.475,34.9 r225 top
C93 "100nF 16V" C_0402 96.225,36.025 r315 top
C94 "100nF 16V" C_0402 97.075,39.575 r45 bottom
C95 "100nF 16V" C_0402 103.025,44.975 r315 top
C96 "100nF 16V" C_0402 88.75,40.9 r180 bottom
C97 "100nF 16V" C_0402 101.85,42.275 r45 top
C98 "100nF 16V" C_0402 96.275,48.15 r135 bottom
C99 "100nF 16V" C_0402 96.8,50.125 r180 bottom
C100 "100nF 16V" C_0402 99.125,39.625 r45 top
C101 "100nF 16V" C_0402 100.25,41.1 r225 bottom
C102 "10uF 16V" C_0603 98.35,46.05 r225 bottom
C103 "1nF 16V" C_0402 97.975,36.875 r225 top
C104 "100nF 16V" C_0402 93.35,46.6 r45 bottom
C105 "100nF 16V" C_0402 108.864,55.336 r315 bottom
C106 "100nF 16V" C_0402 110.4,57.15 r135 bottom
C107 "100nF 16V" C_0402 109.25,52.875 r225 bottom
C108 "100nF 16V" C_0402 111.475,51.525 r45 bottom
C109 "100nF 16V" C_0402 109.125,57.85 r45 bottom
C110 "10uF 16V" C_0603 108.025,54.425 r315 bottom
C111 "2u2 16V" C_0402 106.65,53.9 r315 bottom
C112 "100nF 16V" C_0402 116.236,48.76 r90 bottom
C113 "10uF 16V" C_0603 57.15,83.725 r180 bottom
C114 "100nF 16V" C_0402 56.682,85.045 r180 bottom
C115 "100nF 16V" C_0402 52.084,86.113 r0 bottom
C116 "100nF 16V" C_0402 52.625,83.325 r90 bottom
C117 "1uF 16V" C_0603 53.85,82.85 r90 bottom
C118 "470pF 16V" C_0402 55.2,83.225 r90 bottom
C119 "10pF" C_0402 48.65,81.155 r90 top
C120 "10pF" C_0402 48.65,79.175 r270 top
C121 "10pF" C_0402 48.55,88.145 r90 top
C122 "10pF" C_0402 48.55,86.05 r270 top
C123 "100nF 16V" C_0402 40.725,79.825 r270 bottom
C124 "100nF 16V" C_0402 63.5,55.15 r90 top
C125 "18pF 16V" C_0402 57.025,76.62 r270 top
C126 "18pF 16V" C_0402 51.65,79.325 r90 top
C127 "1uF 16V" C_0603 61.625,88 r0 top
C128 "100nF 16V" C_0402 60.92,26.625 r0 top
C129 "10uF 16V" C_0603 61.3,25.475 r0 top
C130 "100nF 16V" C_0402 46.85,52 r270 bottom
C131 "10uF 16V" C_0603 48.425,51.525 r270 bottom
C132 "100nF 16V" C_0402 55.672,60.55 r270 top
C133 "100nF 16V" C_0402 47.175,54.825 r90 top
C134 "18pF 16V" C_0402 44.65,58.925 r180 bottom
C135 "18pF 16V" C_0402 42.1,58.9 r0 bottom
C136 "10uF 16V" C_0603 105.075,79.9 r90 top
C137 "NC" C_0402 139.525,76.725 r270 top
C138 "NC" C_0402 134.856,76.725 r270 top
C139 "10uF 16V" C_0603 133.225,71.7 r270 top
C140 "100uF 10V" C_CASE-B 136.375,71 r0 top
C141 "22pF 16V" C_0402 103.65,69.55 r0 top
C142 "22pF 16V" C_0402 103.65,70.913 r0 top
C143 "22pF 16V" C_0402 103.625,72.275 r0 top
C144 "100nF 16V" C_0402 103.625,73.638 r0 top
C145 "100nF 16V" C_0402 116.45,74.425 r180 bottom
C146 "100nF 16V" C_0402 133.7,32.775 r90 top
C147 "100nF 16V" C_0402 116.8,26.325 r270 top
C148 "10uF 16V" C_0603 115.025,25.9 r270 top
C149 "100nF 16V" C_0402 136.075,36.9 r90 top
C150 "18pF 16V" C_0402 81.305,81.75 r0 bottom
C151 "18pF 16V" C_0402 81.305,76.675 r180 bottom
C152 "10uF 16V" C_0603 87.375,80 r0 top
C153 "100nF 16V" C_0402 87.025,78.7 r0 top
C154 "100nF 16V" C_0402 81.975,67.65 r90 top
C155 "100nF 16V" C_0402 86.275,67.95 r90 bottom
C156 "18pF 16V" C_0402 91.1,67.925 r270 bottom
C157 "100nF 16V" C_0402 84.275,64.675 r180 bottom
C158 "NC" C_0402 92.35,83.675 r180 top
C159 "NC" C_0402 92.375,80.6 r180 top
C160 "100nF 16V" C_0402 65.75,42.7 r180 bottom
C161 "100nF 10V" C_0201#2 85.925,49.325 r135 bottom
C162 "100nF 16V" C_0402 82.544,60.954 r225 bottom
C163 "100nF 16V" C_0402 83.419,60.079 r45 bottom
C164 "100nF 16V" C_0402 105.5,37.975 r135 bottom
C165 "100nF 16V" C_0402 100.9,32.3 r225 bottom
D1 "LXES15AAA1-153" FP-LXES15-MFG 145.506,76.805 r270 top
D2 "ESDA6V1-5SC6" SOT-23-6 113.425,70.45 r180 bottom
D3 "LXES15AAA1-153" FP-LXES15-MFG 144.975,38.282 r270 top
FB1 "150R" FB_0603 54.175,87.65 r180 bottom
J1 "DC005" DC005 33.072,31.215 r0 top
J2 "HR911105A" HR911105A 35.296,81.107 r90 top
J3 "USB-231-ARY" TYPE-A_W14xD14.45xH7 38.129,65.307 r270 top
J4 "BWSMA-KE-P001" BATWIRELESS_BWSMA-KE-P001 150.775,77.2 r90 top
J5 "SIM8060-6-1-14-00-A" SIM8060-6-1-14-00-A 119.95,82.8 r0 bottom
J6 "BWSMA-KE-P001" BATWIRELESS_BWSMA-KE-P001 150.75,38.725 r90 top
J7 "header_2.54_16pin_2row" header_2.54_16pin_2row 87.095,28.215 r180 top
J8 "FTSH-110-01-L-DV-K-A" FTSH-110-01-L-DV-K-A 106.863,31.697 r45 bottom
L1 "LQM2HPN2R2MG0L" FP-LQM2HPN_G0-IPC_C 60.199,43.575 r180 top
L2 "LQM2HPN2R2MG0L" FP-LQM2HPN_G0-IPC_C 63.899,43.525 r0 top
L3 "LQM2HPN2R2MG0L" FP-LQM2HPN_G0-IPC_C 66.275,49.726 r270 top
L4 "FXL0630-100-M" FXL0630 56.425,29.875 r90 top
L5 "FXL0420-4R7-M" FXL0420 54.862,67.571 r90 top
L6 "FXL0420-4R7-M" FXL0420 134.575,62.2 r0 top
L7 "LQG15HS47NJ02D" FP-LQG15HH_02-IPC_B 138.575,38.254 r270 top
L8 "LQM2HPN2R2MG0L" FP-LQM2HPN_G0-IPC_C 84.15,67.175 r90 bottom
LED1 "LED_0603_RED" LED_0603 27.125,37.775 r90 top
LED2 "LED_0603_YELLOW" LED_0603 151.025,68.95 r90 top
LED3 "LED_0603_YELLOW" LED_0603 151.025,63.469 r90 top
LED4 "LED_0603_BLUE" LED_0603 151.025,52.506 r90 top
LED5 "LED_0603_BLUE" LED_0603 151.025,47.025 r90 top
LED6 "LED_0603_GREEN" LED_0603 151.025,57.988 r90 top
MNH1 "PMNH_3.2MM" PMNH_3.2MM 141.104,31 r0 top
MNH2 "PMNH_3.2MM" PMNH_3.2MM 72.127,31 r0 top
MNH3 "PMNH_3.2MM" PMNH_3.2MM 72.127,85 r0 top
MNH4 "PMNH_3.2MM" PMNH_3.2MM 141.127,85 r0 top
R1 "5K1" R_0603 34.05,49.425 r90 top
R2 "5K1" R_0603 36.075,49.45 r90 top
R3 "5K1" R_0603 33.35,37.475 r270 top
R4 "75K" R_0603 52.2,27.775 r90 top
R5 "10K" R_0603 50.3,27.8 r270 top
R6 "100K" R_0603 47.925,71.325 r0 bottom
R7 "56K" R_0603 50.18,70.969 r0 top
R8 "12K" R_0603 50.154,72.442 r180 top
R9 "62K" R_0603 136.175,58.975 r0 top
R10 "100K" R_0603 128.875,56.375 r180 bottom
R11 "12K" R_0603 136.175,57.475 r180 top
R12 "10K" R_0402 66.35,53.425 r180 bottom
R13 "10K" R_0402 57.175,45.65 r180 bottom
R14 "10K" R_0402 66.4,52.1 r180 bottom
R15 "10K" R_0402 81.775,41.325 r135 top
R16 "NC" R_0402 109.147,41.846 r225 bottom
R17 "100K" R_0402 110.004,40.978 r225 top
R18 "NC" R_0402 108.29,42.692 r225 top
R19 "NC" R_0402 106.576,44.406 r225 top
R20 "NC" R_0402 110.861,40.121 r225 top
R21 "NC" R_0402 109.147,41.835 r225 top
R22 "NC" R_0402 107.433,43.549 r225 top
R23 "NC" R_0402 105.719,45.263 r225 top
R24 "NC" R_0402 108.303,42.7 r225 bottom
R25 "NC" R_0402 104.85,46.125 r225 bottom
R26 "100K" R_0402 104,46.975 r225 bottom
R27 "100K" R_0402 104.862,46.12 r225 top
R28 "100K" R_0402 107.41,43.518 r225 bottom
R29 "100K" R_0402 106.575,44.425 r225 bottom
R30 "NC" R_0402 105.7,45.25 r225 bottom
R31 "NC" R_0402 104.005,46.977 r225 top
R32 "100R" R_0402 116.125,51.5 r0 top
R33 "100K" R_0402 110.875,43.575 r45 bottom
R34 "NC" R_0402 111.734,42.708 r45 top
R35 "100K" R_0402 109.997,44.444 r45 top
R36 "100K" R_0402 108.3,46.141 r45 top
R37 "100K" R_0402 112.591,41.851 r45 top
R38 "100K" R_0402 110.877,43.565 r45 top
R39 "100K" R_0402 109.166,45.275 r45 top
R40 "100K" R_0402 107.452,46.99 r45 top
R41 "100K" R_0402 110,44.425 r45 bottom
R42 "100K" R_0402 106.6,47.85 r45 bottom
R43 "NC" R_0402 105.75,48.7 r45 bottom
R44 "NC" R_0402 106.585,47.856 r45 top
R45 "NC" R_0402 109.175,45.275 r45 bottom
R46 "NC" R_0402 108.325,46.15 r45 bottom
R47 "100K" R_0402 107.45,46.975 r45 bottom
R48 "100K" R_0402 105.737,48.705 r45 top
R49 "240R" R_0402 96.35,40.55 r225 bottom
R50 "10K" R_0402 98.696,36.121 r225 top
R51 "10K" R_0402 97.175,37.6 r225 top
R52 "10K" R_0402 114.761,48.76 r270 bottom
R53 "10K" R_0402 107.4,60.425 r90 bottom
R54 "10K" R_0402 108.75,60.375 r90 bottom
R55 "10K" R_0402 105.3,61.725 r135 top
R56 "10K" R_0402 105.996,60.412 r90 bottom
R57 "10K" R_0402 96.325,57.025 r180 bottom
R58 "10K" R_0402 104.546,60.412 r90 bottom
R59 "10K" R_0402 103.146,60.412 r90 bottom
R60 "10K" R_0402 96.3,58.275 r180 bottom
R61 "10K" R_0402 104.346,60.704 r135 top
R62 "10K" R_0402 103.325,59.7 r135 top
R63 "49R9" R_0402 47.475,86.1 r270 top
R64 "49R9" R_0402 47.475,88.1 r90 top
R65 "49R9" R_0402 47.475,79.225 r270 top
R66 "49R9" R_0402 47.475,81.125 r90 top
R67 "0R" R_0402 56.975,78.575 r270 top
R68 "470R" R_0402 33.55,84.425 r90 bottom
R69 "470R" R_0402 33.6,76.7 r90 bottom
R70 "10K" R_0402 33.65,74.35 r90 bottom
R71 "NC" R_0402 57.85,81.525 r270 top
R72 "NC" R_0402 57.425,80.05 r0 top
R73 "1K5" R_0402 64.525,85.175 r90 top
R74 "1K5" R_0402 66.8,84.6 r90 top
R75 "1K5" R_0402 62.25,76.45 r0 top
R76 "10K" R_0402 72.975,76.4 r180 top
R77 "10K" R_0402 69.275,75.45 r0 bottom
R78 "10K" R_0402 70.15,76.4 r0 top
R79 "10K" R_0402 60.525,75.5 r0 bottom
R80 "12K1" R_0402 51.55,84.525 r270 bottom
R81 "10K" R_0402 57.7,88.9 r180 top
R82 "10K" R_0402 75.223,38.375 r270 bottom
R83 "10K" R_0402 76.569,38.375 r270 bottom
R84 "10K" R_0402 69.775,38.4 r270 bottom
R85 "10K" R_0402 71.175,38.4 r270 bottom
R86 "10K" R_0402 72.608,38.4 r270 bottom
R87 "10K" R_0402 73.904,38.4 r270 bottom
R88 "10K" R_0402 68.425,38.4 r270 bottom
R89 "10K" R_0402 45,50.425 r0 top
R90 "10K" R_0402 45.425,58.175 r180 top
R91 "10K" R_0402 44.975,51.825 r0 top
R92 "10K" R_0402 53.947,57.87 r180 top
R93 "2K7" R_0402 41.2,51.825 r0 top
R94 "10K" R_0402 50.772,58.62 r90 top
R95 "0R" R_0402 142.531,77.205 r180 top
R96 "0R" R_0402 137.225,77.2 r180 top
R97 "0R" R_0402 132.756,77.205 r180 top
R98 "5K1" R_0603 141.1,73.85 r0 bottom
R99 "5K1" R_0603 141.1,72.475 r0 bottom
R100 "47K" R_0603 99.6,75.825 r0 top
R101 "5K1" R_0603 141.584,66.1 r270 bottom
R102 "5K1" R_0603 141.825,60.675 r90 bottom
R103 "47K" R_0603 139.934,66.075 r270 bottom
R104 "47K" R_0603 140.1,60.675 r90 bottom
R105 "10R" R_0402 119.45,73.725 r270 bottom
R106 "10R" R_0402 122,73.725 r270 bottom
R107 "10R" R_0402 123.25,73.725 r270 bottom
R108 "10R" R_0402 134.1,36.375 r180 top
R109 "5K1" R_0603 144.5,49.7 r0 bottom
R110 "5K1" R_0603 144.5,47.85 r0 bottom
R111 "10K" R_0402 78.625,68 r270 top
R112 "10K" R_0402 77.525,67.975 r270 bottom
R113 "10K" R_0402 77.375,67.975 r270 top
R114 "10K" R_0402 76.075,67.975 r270 top
R115 "10K" R_0402 80.05,67.95 r270 bottom
R116 "10K" R_0402 78.75,68 r270 bottom
R117 "0R" R_0402 92.85,82.225 r270 top
R118 "0R" R_0402 92.875,79.075 r270 top
R119 "10K" R_0402 63.275,42.7 r0 bottom
R120 "49R9" R_0402 88.9,49.8 r225 bottom
R121 "33R" R_0402 93.7,56.975 r225 top
R122 "33R" R_0402 75.275,40.675 r270 bottom
R123 "33R" R_0402 92.85,57.9 r225 top
R124 "33R" R_0402 76.575,40.675 r270 bottom
R125 "33R" R_0402 96.3,59.55 r180 bottom
R126 "33R" R_0402 69.8,40.65 r270 bottom
R127 "33R" R_0402 96.275,60.75 r180 bottom
R128 "33R" R_0402 71.175,40.65 r270 bottom
R129 "33R" R_0402 91.875,58.775 r225 top
R130 "33R" R_0402 72.525,40.675 r270 bottom
R131 "33R" R_0402 90.975,59.775 r225 top
R132 "33R" R_0402 96.325,63.475 r180 bottom
R133 "33R" R_0402 73.925,40.675 r270 bottom
R134 "33R" R_0402 96.275,62.1 r180 bottom
R135 "33R" R_0402 68.45,40.675 r270 bottom
R136 "33R" R_0402 89.075,61.6 r225 top
R137 "33R" R_0402 80.875,63.925 r180 bottom
R138 "33R" R_0402 90.025,60.725 r225 top
R139 "33R" R_0402 80.85,65.125 r180 bottom
R140 "33R" R_0402 79.825,62.4 r180 top
R141 "33R" R_0402 79.8,63.725 r180 top
R142 "33R" R_0402 80.825,62.55 r180 bottom
R143 "33R" R_0402 79.725,64.925 r180 top
R144 "100R" R_0402 71.475,69.125 r270 bottom
R145 "100R" R_0402 73.175,69.05 r270 bottom
R146 "100R" R_0402 69.75,69.1 r270 bottom
R147 "100R" R_0402 70.729,66.2 r270 top
R148 "33R" R_0402 67.286,66.2 r270 top
R149 "33R" R_0402 67.975,69.05 r270 bottom
R150 "33R" R_0402 66.275,69.05 r270 bottom
R151 "33R" R_0402 65.564,66.2 r270 top
R152 "100R" R_0402 69.007,66.2 r270 top
R153 "33R" R_0402 64.6,69.125 r270 bottom
R154 "100R" R_0402 60.4,66.2 r270 top
R155 "100R" R_0402 62.875,69.1 r270 bottom
R156 "100R" R_0402 72.45,66.2 r270 top
R157 "100R" R_0402 63.843,66.2 r270 top
R158 "100R" R_0402 61.225,69.075 r270 bottom
R159 "33R" R_0402 62.121,66.2 r270 top
R160 "4K7" R_0402 63.575,48.6 r180 bottom
R161 "4K7" R_0402 63.575,49.55 r180 bottom
R162 "4K7" R_0402 81.85,31.125 r180 bottom
R163 "4K7" R_0402 81.85,32.2 r180 bottom
R164 "5K1" R_0603 147.925,56.65 r0 bottom
R165 "47K" R_0603 144.5,51.675 r180 bottom
R166 "4K7" R_0402 104.325,37.05 r135 bottom
R167 "4K7" R_0402 111.775,29.575 r315 bottom
R168 "4K7" R_0402 102.7,25.775 r135 bottom
SW1 "KMR231GLFS" FP-KMR231GLFS-MFG 63.55,35.975 r0 top
SW2 "KMR231GLFS" FP-KMR231GLFS-MFG 63.55,29.75 r0 top
SW3 "DSHP01TSGER" DSHP01TSGER 120.85,56.15 r180 top
TP1 "TPAD6R" TP06R 81.975,39.75 r90 bottom
U1 "CP2102N-A02-GQFN28R" FP-CP2102N-A02-GQFN28R-MFG 45.725,45.325 r0 top
U2 "GT-USB-7010ASV" GT-USB-7010ASV 28.375,44.875 r270 top
U3 "USBLC6-2SC6" SOT-23-6 37.45,44.8 r0 top
U4 "TPS65217CRSLR" QFN40P600X600X100-49N-D 60.475,49.775 r0 top
U5 "TPS54302DDCR" FP-DDC0006A-MFG 46.125,27.35 r270 top
U6 "TPS54302DDCR" FP-DDC0006A-MFG 48.529,67.823 r90 top
U7 "TPS54302DDCR" FP-DDC0006A-MFG 128.25,59.7 r270 top
U8 "AM3358BZCZ100" BGA324C80P18X18_1500X1500X140 84.083,52.898 r135 top
U9 "SN74LVC1G07DCKR" FP-DCK0005A-IPC_C 75.75,47.05 r270 bottom
U10 "K4B4G1646E-BYMA" BGA96C80P9X16_750X1330X120 95.469,42.517 r315 top
U11 "KLM4G1FETE-B041" BGA153C50P14X14_1100X1000X80 110.015,56.25 r45 top
U12 "SN74LVC1G06DCKR" FP-DCK0005A-MFG 119.311,48.71 r0 bottom
U13 "LAN8710A-EZC-TR" FP-LAN8710A-EZC-TR-MFG 54.454,85.363 r90 top
U14 "SN74AHC1G08DBVR" FP-DBV0005A-MFG 66.425,54.925 r180 top
U15 "SD_502570-0893" MOLEX_502570-0893 59.759,32.053 r0 bottom
U16 "FE1.1S-BQFN24B" QFN50P400X400X80-25N-D 43.525,54.975 r270 top
U17 "TPS2051BDBVR" DBV0005A_L 53.147,60.12 r0 top
U18 "USBLC6-2SC6" SOT-23-6 42.176,61.775 r0 top
U19 "A7670E" A7670 119,77.075 r270 top
U20 "AO3402" SOT-23-3 99.85,79.075 r90 top
U21 "AO3402" SOT-23-3 144.356,61.325 r90 bottom
U22 "AO3402" SOT-23-3 144.365,66.775 r90 bottom
U23 "NEO-F9P" NEO-F9P 125.25,31.725 r0 top
U24 "AP6256" AP6256 89.075,71.875 r270 top
U25 "24LC32AT-I/OT" SOT-23-5 64.475,45.45 r270 bottom
U26 "AO3402" SOT-23-3 144.425,54.925 r90 bottom
Y1 "24MHz 20pF" CRYSTAL_SMD3225-4P 89.75,63.15 r225 bottom
Y2 "32.768kHz 12.5pF" CRYSTAL_SMD3215-2P 79.925,43.475 r315 top
Y3 "25MHz 20pF" CRYSTAL_SMD3225-4P 54.139,77.709 r90 top
Y4 "12MHz 20pF" CRYSTAL_SMD3225-4P 43.352,61.5 r180 bottom
Y5 "37.4MHz 16pF" CRYSTAL_SMD3225-4P 81.25,79.377 r270 bottom
Y6 "YSO120TK 32.768kHz" CRYSTAL_SMD3225-4P 88.55,68.475 r0 bottom

## Footprints (in the part's own frame and the unit in brackets; to place one, negate y for a bottom-side part, rotate by r counter-clockwise, add the part's x,y. Pads: shape width x height; smd on the part's side, far side on the other; paste and mask are expansions set on the pad)
A7670 [mm]
  rect 0.8x0.6 smd: 1(-11.53,8.225) 2(-11.53,7.225) 3(-11.53,6.225) 4(-11.53,5.225) 5(-11.53,4.225) 6(-11.53,3.225) 7(-11.53,2.225) 8(-11.53,1.225) 9(-11.53,0.225) 10(-11.53,-0.775) 11(-11.53,-1.775) 12(-11.53,-2.775) 13(-11.53,-3.775) 14(-11.53,-4.775) 15(-11.53,-5.775) 16(-11.53,-6.775) 17(-11.53,-7.775) 35(11.27,-7.775) 36(11.27,-6.775) 37(11.27,-5.775) 38(11.27,-4.775) 39(11.27,-3.775) 40(11.27,-2.775) 41(11.27,-1.775) 42(11.27,-0.775) 43(11.27,0.225) 44(11.27,1.225) 45(11.27,2.225) 46(11.27,3.225) 47(11.27,4.225) 48(11.27,5.225) 49(11.27,6.225) 50(11.27,7.225) 51(11.27,8.225)
  rect 0.6x0.8 smd: 18(-8.13,-11.175) 19(-7.13,-11.175) 20(-6.13,-11.175) 21(-5.13,-11.175) 22(-4.13,-11.175) 23(-3.13,-11.175) 24(-2.13,-11.175) 25(-1.13,-11.175) 26(-0.13,-11.175) 27(0.87,-11.175) 28(1.87,-11.175) 29(2.87,-11.175) 30(3.87,-11.175) 31(4.87,-11.175) 32(5.87,-11.175) 33(6.87,-11.175) 34(7.87,-11.175) 52(7.87,11.625) 53(6.87,11.625) 54(5.87,11.625) 55(4.87,11.625) 56(3.87,11.625) 57(2.87,11.625) 58(1.87,11.625) 59(0.87,11.625) 60(-0.13,11.625) 61(-1.13,11.625) 62(-2.13,11.625) 63(-3.13,11.625) 64(-4.13,11.625) 65(-5.13,11.625) 66(-6.13,11.625) 67(-7.13,11.625) 68(-8.13,11.625)
  rect 2.1x2.1 smd: 69(-7.73,7.825) 70(-7.73,4.025) 71(-7.73,0.225) 72(-7.73,-3.575) 73(-7.73,-7.375) 74(-3.93,-7.375) 75(-0.13,-7.375) 76(3.67,-7.375) 77(7.47,-7.375) 78(7.47,-3.575) 79(7.47,0.225) 80(7.47,4.025) 81(7.47,7.825) 82(3.67,7.825) 83(-0.13,7.825) 84(-3.93,7.825) 85(-3.93,0.225) 86(-0.13,-3.575) 87(3.67,0.225) 88(-0.13,4.025)
  silkscreen extent -12.58,-11.77 11.87,12.23, body extent -12.13,-11.77 11.87,12.23, height 2.87
ANT_1206 [mm]
  rect 1x1.8 smd: 1(-1.55,0.05) 2(1.55,0.05)
  Top Layer region: 4.525,-0.85 4.525,0.95 2.025,0.95 2.025,-0.85
  silkscreen extent -2.4,-1.2 1.55,1.3, body extent -1.73,-0.75 1.47,0.85, height 1.35
AP6256 [mm]
  rect 1.125x0.5 smd: 1(-5.499,4.695) 2(-5.499,3.795) 3(-5.499,2.895) 4(-5.499,1.995) 5(-5.499,1.095) 6(-5.499,0.195) 7(-5.499,-0.705) 8(-5.499,-1.605) 9(-5.499,-2.505) 10(-5.499,-3.405) 11(-5.499,-4.305) 23(5.877,-4.305) 24(5.877,-3.405) 25(5.877,-2.505) 26(5.877,-1.605) 27(5.877,-0.705) 28(5.877,0.195) 29(5.877,1.095) 30(5.877,1.995) 31(5.877,2.895) 32(5.877,3.795) 33(5.877,4.695)
  rect 0.5x1.125 smd: 12(-4.311,-5.493) 13(-3.411,-5.493) 14(-2.511,-5.493) 15(-1.611,-5.493) 16(-0.711,-5.493) 17(0.189,-5.493) 18(1.089,-5.493) 19(1.989,-5.493) 20(2.889,-5.493) 21(3.789,-5.493) 22(4.689,-5.493) 34(4.689,5.883) 35(3.789,5.883) 36(2.889,5.883) 37(1.989,5.883) 38(1.089,5.883) 39(0.189,5.883) 40(-0.711,5.883) 41(-1.611,5.883) 42(-2.511,5.883) 43(-3.411,5.883) 44(-4.311,5.883)
  round 0.65 smd: TP1(-2.511,3.795) TP2(-0.711,3.795) TP3(1.089,3.795)
  silkscreen extent -6.61,-5.81 6.19,6.19, body extent -5.81,-5.81 6.19,6.19, height 1.7
BATWIRELESS_BWSMA-KE-P001 [mm]
  rect 1.6x4.2 smd: 1(0,0)
  rect 1.3x4.2 smd: G1(-2.55,0) G2(2.55,0)
  rect 1.3x4.2 smd far side: G3(2.55,0) G4(-2.55,0)
  body extent -3.25,-11.15 3.25,2.35, height 3.65
BGA96C80P9X16_750X1330X120 [mm]
  round 0.45 smd: A1(-3.334,5.831) A2(-2.534,5.831) A3(-1.734,5.831) A7(1.466,5.831) A8(2.266,5.831) A9(3.066,5.831) B1(-3.334,5.031) B2(-2.534,5.031) B3(-1.734,5.031) B7(1.466,5.031) B8(2.266,5.031) B9(3.066,5.031) C1(-3.334,4.231) C2(-2.534,4.231) C3(-1.734,4.231) C7(1.466,4.231) C8(2.266,4.231) C9(3.066,4.231) D1(-3.334,3.431) D2(-2.534,3.431) D3(-1.734,3.431) D7(1.466,3.431) D8(2.266,3.431) D9(3.066,3.431) E1(-3.334,2.631) E2(-2.534,2.631) E3(-1.734,2.631) E7(1.466,2.631) E8(2.266,2.631) E9(3.066,2.631) F1(-3.334,1.831) F2(-2.534,1.831) F3(-1.734,1.831) F7(1.466,1.831) F8(2.266,1.831) F9(3.066,1.831) G1(-3.334,1.031) G2(-2.534,1.031) G3(-1.734,1.031) G7(1.466,1.031) G8(2.266,1.031) G9(3.066,1.031) H1(-3.334,0.231) H2(-2.534,0.231) H3(-1.734,0.231) H7(1.466,0.231) H8(2.266,0.231) H9(3.066,0.231) J1(-3.334,-0.569) J2(-2.534,-0.569) J3(-1.734,-0.569) J7(1.466,-0.569) J8(2.266,-0.569) J9(3.066,-0.569) K1(-3.334,-1.369) K2(-2.534,-1.369) K3(-1.734,-1.369) K7(1.466,-1.369) K8(2.266,-1.369) K9(3.066,-1.369) L1(-3.334,-2.169) L2(-2.534,-2.169) L3(-1.734,-2.169) L7(1.466,-2.169) L8(2.266,-2.169) L9(3.066,-2.169) M1(-3.334,-2.969) M2(-2.534,-2.969) M3(-1.734,-2.969) M7(1.466,-2.969) M8(2.266,-2.969) M9(3.066,-2.969) N1(-3.334,-3.769) N2(-2.534,-3.769) N3(-1.734,-3.769) N7(1.466,-3.769) N8(2.266,-3.769) N9(3.066,-3.769) P1(-3.334,-4.569) P2(-2.534,-4.569) P3(-1.734,-4.569) P7(1.466,-4.569) P8(2.266,-4.569) P9(3.066,-4.569) R1(-3.334,-5.369) R2(-2.534,-5.369) R3(-1.734,-5.369) R7(1.466,-5.369) R8(2.266,-5.369) R9(3.066,-5.369) T1(-3.334,-6.169) T2(-2.534,-6.169) T3(-1.734,-6.169) T7(1.466,-6.169) T8(2.266,-6.169) T9(3.066,-6.169)
  silkscreen extent -4.01,-6.82 3.64,6.58, body extent -3.88,-6.82 3.62,6.48, height 1.2
BGA153C50P14X14_1100X1000X80 [mm]
  round 0.29 smd: A1(-3.266,3.276) A2(-2.766,3.276) A3(-2.266,3.276) A4(-1.766,3.276) A5(-1.266,3.276) A6(-0.766,3.276) A7(-0.266,3.276) A8(0.234,3.276) A9(0.734,3.276) A10(1.234,3.276) A11(1.734,3.276) A12(2.234,3.276) A13(2.734,3.276) A14(3.234,3.276) B1(-3.266,2.776) B2(-2.766,2.776) B3(-2.266,2.776) B4(-1.766,2.776) B5(-1.266,2.776) B6(-0.766,2.776) B7(-0.266,2.776) B8(0.234,2.776) B9(0.734,2.776) B10(1.234,2.776) B11(1.734,2.776) B12(2.234,2.776) B13(2.734,2.776) B14(3.234,2.776) C1(-3.266,2.276) C2(-2.766,2.276) C3(-2.266,2.276) C4(-1.766,2.276) C5(-1.266,2.276) C6(-0.766,2.276) C7(-0.266,2.276) C8(0.234,2.276) C9(0.734,2.276) C10(1.234,2.276) C11(1.734,2.276) C12(2.234,2.276) C13(2.734,2.276) C14(3.234,2.276) D1(-3.266,1.776) D2(-2.766,1.776) D3(-2.266,1.776) D4(-1.766,1.776) D12(2.234,1.776) D13(2.734,1.776) D14(3.234,1.776) E1(-3.266,1.276) E2(-2.766,1.276) E3(-2.266,1.276) E5(-1.266,1.276) E6(-0.766,1.276) E7(-0.266,1.276) E8(0.234,1.276) E9(0.734,1.276) E10(1.234,1.276) E12(2.234,1.276) E13(2.734,1.276) E14(3.234,1.276) F1(-3.266,0.776) F2(-2.766,0.776) F3(-2.266,0.776) F5(-1.266,0.776) F10(1.234,0.776) F12(2.234,0.776) F13(2.734,0.776) F14(3.234,0.776) G1(-3.266,0.276) G2(-2.766,0.276) G3(-2.266,0.276) G5(-1.266,0.276) G10(1.234,0.276) G12(2.234,0.276) G13(2.734,0.276) G14(3.234,0.276) H1(-3.266,-0.224) H2(-2.766,-0.224) H3(-2.266,-0.224) H5(-1.266,-0.224) H10(1.234,-0.224) H12(2.234,-0.224) H13(2.734,-0.224) H14(3.234,-0.224) J1(-3.266,-0.724) J2(-2.766,-0.724) J3(-2.266,-0.724) J5(-1.266,-0.724) J10(1.234,-0.724) J12(2.234,-0.724) J13(2.734,-0.724) J14(3.234,-0.724) K1(-3.266,-1.224) K2(-2.766,-1.224) K3(-2.266,-1.224) K5(-1.266,-1.224) K6(-0.766,-1.224) K7(-0.266,-1.224) K8(0.234,-1.224) K9(0.734,-1.224) K10(1.234,-1.224) K12(2.234,-1.224) K13(2.734,-1.224) K14(3.234,-1.224) L1(-3.266,-1.724) L2(-2.766,-1.724) L3(-2.266,-1.724) L12(2.234,-1.724) L13(2.734,-1.724) L14(3.234,-1.724) M1(-3.266,-2.224) M2(-2.766,-2.224) M3(-2.266,-2.224) M4(-1.766,-2.224) M5(-1.266,-2.224) M6(-0.766,-2.224) M7(-0.266,-2.224) M8(0.234,-2.224) M9(0.734,-2.224) M10(1.234,-2.224) M11(1.734,-2.224) M12(2.234,-2.224) M13(2.734,-2.224) M14(3.234,-2.224) N1(-3.266,-2.724) N2(-2.766,-2.724) N3(-2.266,-2.724) N4(-1.766,-2.724) N5(-1.266,-2.724) N6(-0.766,-2.724) N7(-0.266,-2.724) N8(0.234,-2.724) N9(0.734,-2.724) N10(1.234,-2.724) N11(1.734,-2.724) N12(2.234,-2.724) N13(2.734,-2.724) N14(3.234,-2.724) P1(-3.266,-3.224) P2(-2.766,-3.224) P3(-2.266,-3.224) P4(-1.766,-3.224) P5(-1.266,-3.224) P6(-0.766,-3.224) P7(-0.266,-3.224) P8(0.234,-3.224) P9(0.734,-3.224) P10(1.234,-3.224) P11(1.734,-3.224) P12(2.234,-3.224) P13(2.734,-3.224) P14(3.234,-3.224)
  silkscreen extent -5.62,-4.97 5.48,5.13, body extent -5.52,-4.97 5.48,5.03, height 0.8
BGA324C80P18X18_1500X1500X140 [mm]
  round 0.45 smd: A1(-6.768,6.849) A2(-5.968,6.849) A3(-5.168,6.849) A4(-4.368,6.849) A5(-3.568,6.849) A6(-2.768,6.849) A7(-1.968,6.849) A8(-1.168,6.849) A9(-0.368,6.849) A10(0.432,6.849) A11(1.232,6.849) A12(2.032,6.849) A13(2.832,6.849) A14(3.632,6.849) A15(4.432,6.849) A16(5.232,6.849) A17(6.032,6.849) A18(6.832,6.849) B1(-6.768,6.049) B2(-5.968,6.049) B3(-5.168,6.049) B4(-4.368,6.049) B5(-3.568,6.049) B6(-2.768,6.049) B7(-1.968,6.049) B8(-1.168,6.049) B9(-0.368,6.049) B10(0.432,6.049) B11(1.232,6.049) B12(2.032,6.049) B13(2.832,6.049) B14(3.632,6.049) B15(4.432,6.049) B16(5.232,6.049) B17(6.032,6.049) B18(6.832,6.049) C1(-6.768,5.249) C2(-5.968,5.249) C3(-5.168,5.249) C4(-4.368,5.249) C5(-3.568,5.249) C6(-2.768,5.249) C7(-1.968,5.249) C8(-1.168,5.249) C9(-0.368,5.249) C10(0.432,5.249) C11(1.232,5.249) C12(2.032,5.249) C13(2.832,5.249) C14(3.632,5.249) C15(4.432,5.249) C16(5.232,5.249) C17(6.032,5.249) C18(6.832,5.249) D1(-6.768,4.449) D2(-5.968,4.449) D3(-5.168,4.449) D4(-4.368,4.449) D5(-3.568,4.449) D6(-2.768,4.449) D7(-1.968,4.449) D8(-1.168,4.449) D9(-0.368,4.449) D10(0.432,4.449) D11(1.232,4.449) D12(2.032,4.449) D13(2.832,4.449) D14(3.632,4.449) D15(4.432,4.449) D16(5.232,4.449) D17(6.032,4.449) D18(6.832,4.449) E1(-6.768,3.649) E2(-5.968,3.649) E3(-5.168,3.649) E4(-4.368,3.649) E5(-3.568,3.649) E6(-2.768,3.649) E7(-1.968,3.649) E8(-1.168,3.649) E9(-0.368,3.649) E10(0.432,3.649) E11(1.232,3.649) E12(2.032,3.649) E13(2.832,3.649) E14(3.632,3.649) E15(4.432,3.649) E16(5.232,3.649) E17(6.032,3.649) E18(6.832,3.649) F1(-6.768,2.849) F2(-5.968,2.849) F3(-5.168,2.849) F4(-4.368,2.849) F5(-3.568,2.849) F6(-2.768,2.849) F7(-1.968,2.849) F8(-1.168,2.849) F9(-0.368,2.849) F10(0.432,2.849) F11(1.232,2.849) F12(2.032,2.849) F13(2.832,2.849) F14(3.632,2.849) F15(4.432,2.849) F16(5.232,2.849) F17(6.032,2.849) F18(6.832,2.849) G1(-6.768,2.049) G2(-5.968,2.049) G3(-5.168,2.049) G4(-4.368,2.049) G5(-3.568,2.049) G6(-2.768,2.049) G7(-1.968,2.049) G8(-1.168,2.049) G9(-0.368,2.049) G10(0.432,2.049) G11(1.232,2.049) G12(2.032,2.049) G13(2.832,2.049) G14(3.632,2.049) G15(4.432,2.049) G16(5.232,2.049) G17(6.032,2.049) G18(6.832,2.049) H1(-6.768,1.249) H2(-5.968,1.249) H3(-5.168,1.249) H4(-4.368,1.249) H5(-3.568,1.249) H6(-2.768,1.249) H7(-1.968,1.249) H8(-1.168,1.249) H9(-0.368,1.249) H10(0.432,1.249) H11(1.232,1.249) H12(2.032,1.249) H13(2.832,1.249) H14(3.632,1.249) H15(4.432,1.249) H16(5.232,1.249) H17(6.032,1.249) H18(6.832,1.249) J1(-6.768,0.449) J2(-5.968,0.449) J3(-5.168,0.449) J4(-4.368,0.449) J5(-3.568,0.449) J6(-2.768,0.449) J7(-1.968,0.449) J8(-1.168,0.449) J9(-0.368,0.449) J10(0.432,0.449) J11(1.232,0.449) J12(2.032,0.449) J13(2.832,0.449) J14(3.632,0.449) J15(4.432,0.449) J16(5.232,0.449) J17(6.032,0.449) J18(6.832,0.449) K1(-6.768,-0.351) K2(-5.968,-0.351) K3(-5.168,-0.351) K4(-4.368,-0.351) K5(-3.568,-0.351) K6(-2.768,-0.351) K7(-1.968,-0.351) K8(-1.168,-0.351) K9(-0.368,-0.351) K10(0.432,-0.351) K11(1.232,-0.351) K12(2.032,-0.351) K13(2.832,-0.351) K14(3.632,-0.351) K15(4.432,-0.351) K16(5.232,-0.351) K17(6.032,-0.351) K18(6.832,-0.351) L1(-6.768,-1.151) L2(-5.968,-1.151) L3(-5.168,-1.151) L4(-4.368,-1.151) L5(-3.568,-1.151) L6(-2.768,-1.151) L7(-1.968,-1.151) L8(-1.168,-1.151) L9(-0.368,-1.151) L10(0.432,-1.151) L11(1.232,-1.151) L12(2.032,-1.151) L13(2.832,-1.151) L14(3.632,-1.151) L15(4.432,-1.151) L16(5.232,-1.151) L17(6.032,-1.151) L18(6.832,-1.151) M1(-6.768,-1.951) M2(-5.968,-1.951) M3(-5.168,-1.951) M4(-4.368,-1.951) M5(-3.568,-1.951) M6(-2.768,-1.951) M7(-1.968,-1.951) M8(-1.168,-1.951) M9(-0.368,-1.951) M10(0.432,-1.951) M11(1.232,-1.951) M12(2.032,-1.951) M13(2.832,-1.951) M14(3.632,-1.951) M15(4.432,-1.951) M16(5.232,-1.951) M17(6.032,-1.951) M18(6.832,-1.951) N1(-6.768,-2.751) N2(-5.968,-2.751) N3(-5.168,-2.751) N4(-4.368,-2.751) N5(-3.568,-2.751) N6(-2.768,-2.751) N7(-1.968,-2.751) N8(-1.168,-2.751) N9(-0.368,-2.751) N10(0.432,-2.751) N11(1.232,-2.751) N12(2.032,-2.751) N13(2.832,-2.751) N14(3.632,-2.751) N15(4.432,-2.751) N16(5.232,-2.751) N17(6.032,-2.751) N18(6.832,-2.751) P1(-6.768,-3.551) P2(-5.968,-3.551) P3(-5.168,-3.551) P4(-4.368,-3.551) P5(-3.568,-3.551) P6(-2.768,-3.551) P7(-1.968,-3.551) P8(-1.168,-3.551) P9(-0.368,-3.551) P10(0.432,-3.551) P11(1.232,-3.551) P12(2.032,-3.551) P13(2.832,-3.551) P14(3.632,-3.551) P15(4.432,-3.551) P16(5.232,-3.551) P17(6.032,-3.551) P18(6.832,-3.551) R1(-6.768,-4.351) R2(-5.968,-4.351) R3(-5.168,-4.351) R4(-4.368,-4.351) R5(-3.568,-4.351) R6(-2.768,-4.351) R7(-1.968,-4.351) R8(-1.168,-4.351) R9(-0.368,-4.351) R10(0.432,-4.351) R11(1.232,-4.351) R12(2.032,-4.351) R13(2.832,-4.351) R14(3.632,-4.351) R15(4.432,-4.351) R16(5.232,-4.351) R17(6.032,-4.351) R18(6.832,-4.351) T1(-6.768,-5.151) T2(-5.968,-5.151) T3(-5.168,-5.151) T4(-4.368,-5.151) T5(-3.568,-5.151) T6(-2.768,-5.151) T7(-1.968,-5.151) T8(-1.168,-5.151) T9(-0.368,-5.151) T10(0.432,-5.151) T11(1.232,-5.151) T12(2.032,-5.151) T13(2.832,-5.151) T14(3.632,-5.151) T15(4.432,-5.151) T16(5.232,-5.151) T17(6.032,-5.151) T18(6.832,-5.151) U1(-6.768,-5.951) U2(-5.968,-5.951) U3(-5.168,-5.951) U4(-4.368,-5.951) U5(-3.568,-5.951) U6(-2.768,-5.951) U7(-1.968,-5.951) U8(-1.168,-5.951) U9(-0.368,-5.951) U10(0.432,-5.951) U11(1.232,-5.951) U12(2.032,-5.951) U13(2.832,-5.951) U14(3.632,-5.951) U15(4.432,-5.951) U16(5.232,-5.951) U17(6.032,-5.951) U18(6.832,-5.951) V1(-6.768,-6.751) V2(-5.968,-6.751) V3(-5.168,-6.751) V4(-4.368,-6.751) V5(-3.568,-6.751) V6(-2.768,-6.751) V7(-1.968,-6.751) V8(-1.168,-6.751) V9(-0.368,-6.751) V10(0.432,-6.751) V11(1.232,-6.751) V12(2.032,-6.751) V13(2.832,-6.751) V14(3.632,-6.751) V15(4.432,-6.751) V16(5.232,-6.751) V17(6.032,-6.751) V18(6.832,-6.751)
  silkscreen extent -8.34,-7.45 7.53,7.55, body extent -7.47,-7.45 7.53,7.55, height 1.4
C_0201#1 [mm]
  rect 0.25x0.35 smd: 1(-0.237,0.023) 2(0.237,0.023)
  body extent -0.3,-0.14 0.3,0.19, height 0.29
C_0201#2 [mm]
  rect 0.25x0.35 smd: 1(-0.237,0.023)
  rect 0.25x0.35 smd mask+0.1: 2(0.237,0.023)
  body extent -0.3,-0.14 0.3,0.19, height 0.29
C_0402 [mm]
  rect 0.58x0.64 smd: 1(-0.48,0) 2(0.48,0)
  body extent -0.53,-0.25 0.53,0.25, height 0.55
C_0603 [mm]
  rect 0.9x0.95 smd: 1(-0.775,0) 2(0.775,0)
  body extent -0.8,-0.4 0.8,0.4, height 0.65
C_1206 [mm]
  rect 1.05x1.82 smd: 1(-1.373,0.051) 2(1.407,0.051)
  silkscreen extent 0.02,-0.65 0.02,0.75, body extent -1.58,-0.75 1.62,0.85, height 1.8
C_CASE-B [mm]
  rrect50% 2.23x1.64 smd: 1(-0.069,1.409) 2(-0.069,-1.671)
  silkscreen extent -1.57,-1.88 1.43,3.07, body extent -1.47,-1.75 1.33,1.75, height 2.1
CAP_D6.3xL7.7mm [mm]
  rect 3.2x1.6 smd: 1(-2.667,-0.006) 2(2.333,-0.006)
  silkscreen extent -4.42,-3.31 3.13,3.29, body extent -3.82,-3.31 3.48,3.29, height 7.7
CRYSTAL_SMD3215-2P [mm]
  rect 1x1.8 smd: 1(-1.323,0.041) 2(1.177,0.041)
  silkscreen extent -2.32,-0.71 0.33,0.79, body extent -1.6,-0.71 1.6,0.79, height 0.9
CRYSTAL_SMD3225-4P [mm]
  rect 1.4x1.2 smd: 1(-0.973,-0.85) 2(1.227,-0.85) 3(1.227,0.85) 4(-0.973,0.85)
  silkscreen extent -1.02,-2 -0.92,-1.9, body extent -1.55,-1.33 1.81,1.33, height 0.9